# Allegro board MX6-CUST_V1_3-FINAL.brd
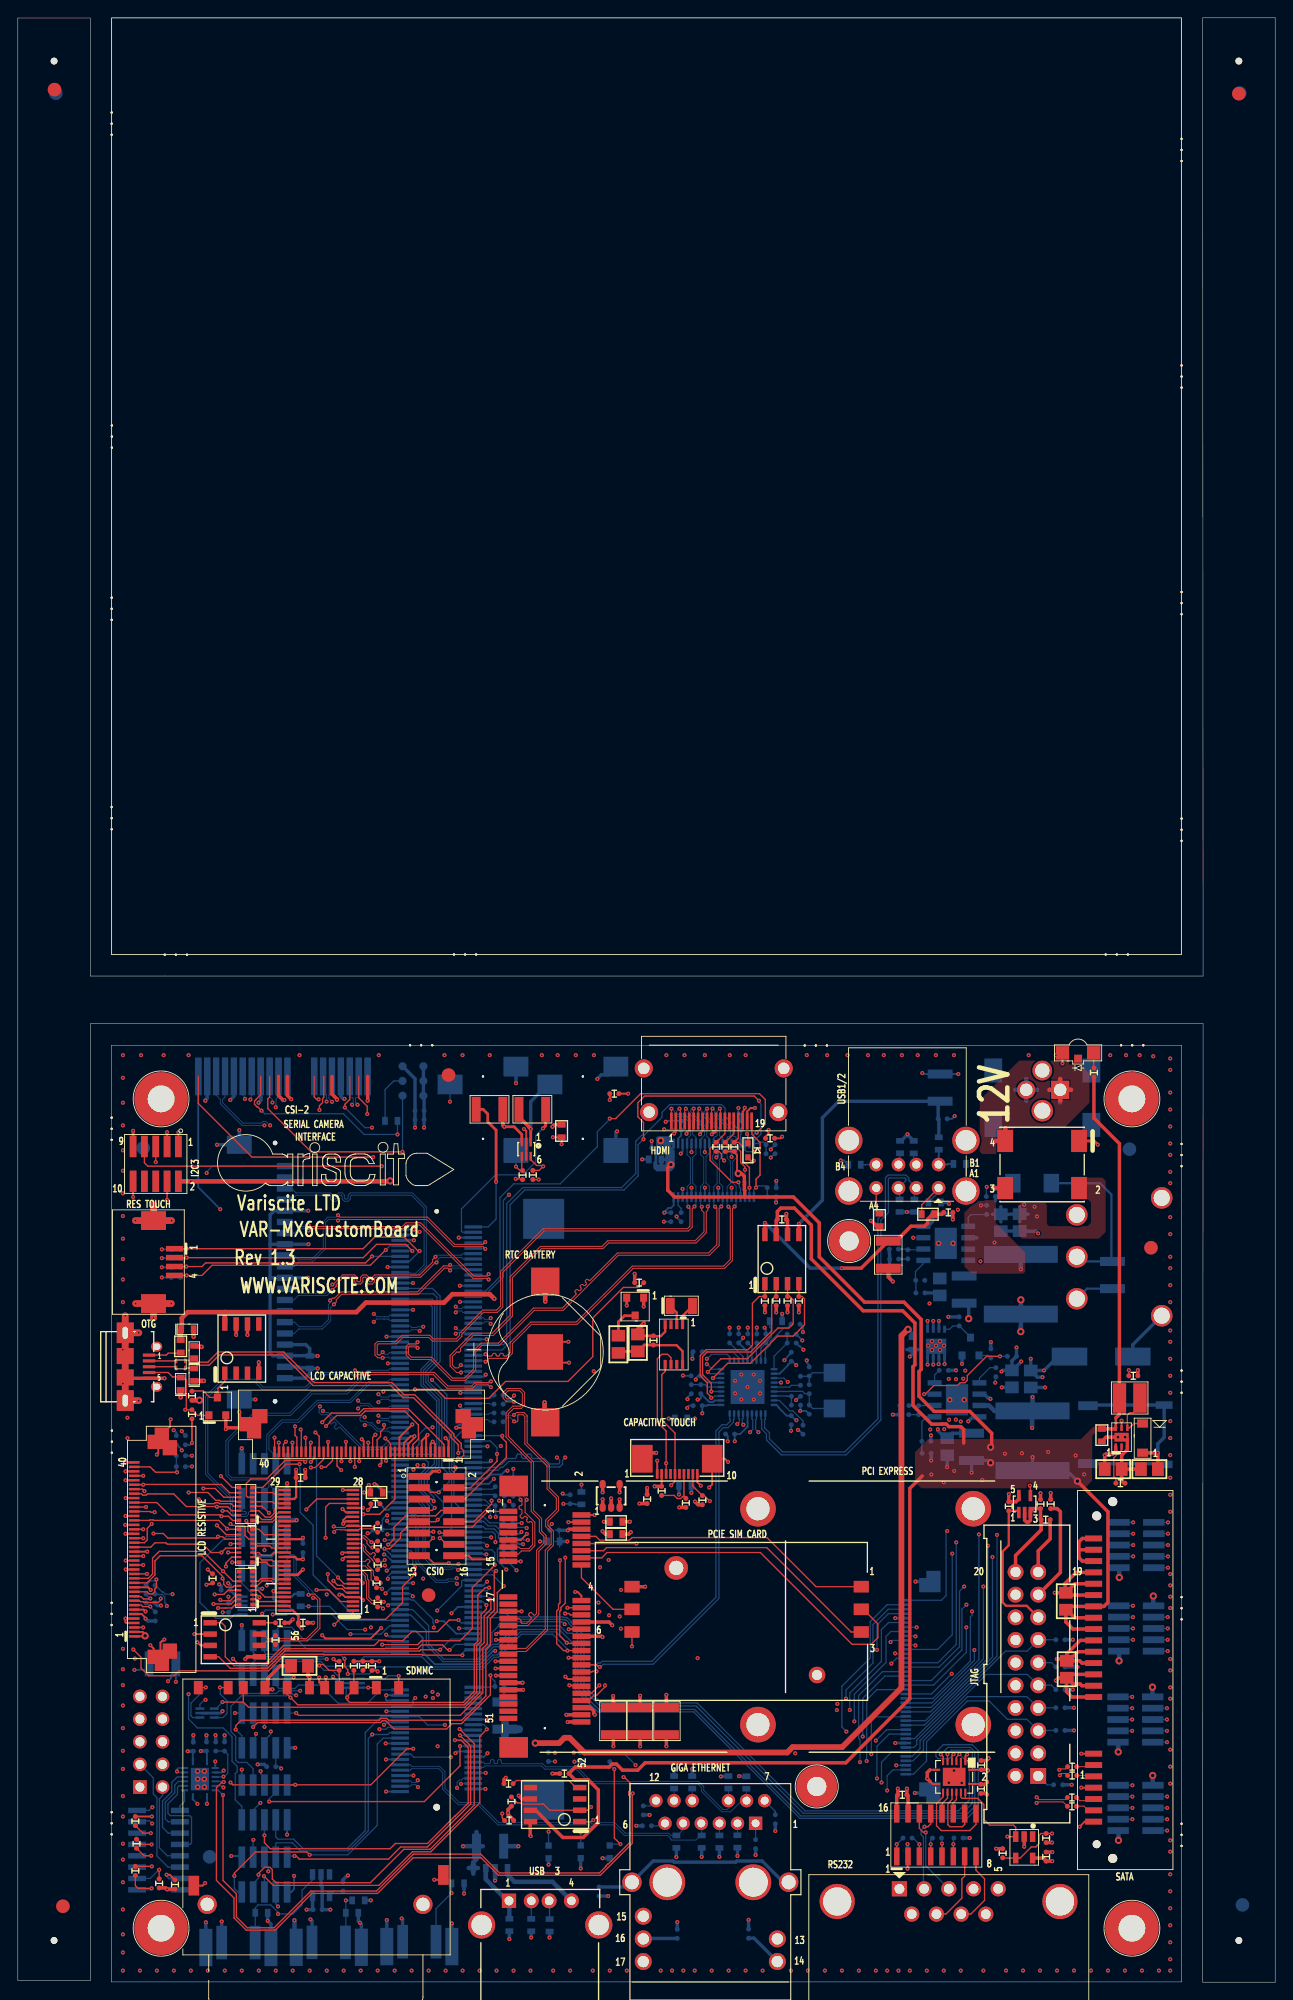
[diagram p0: board, top side]
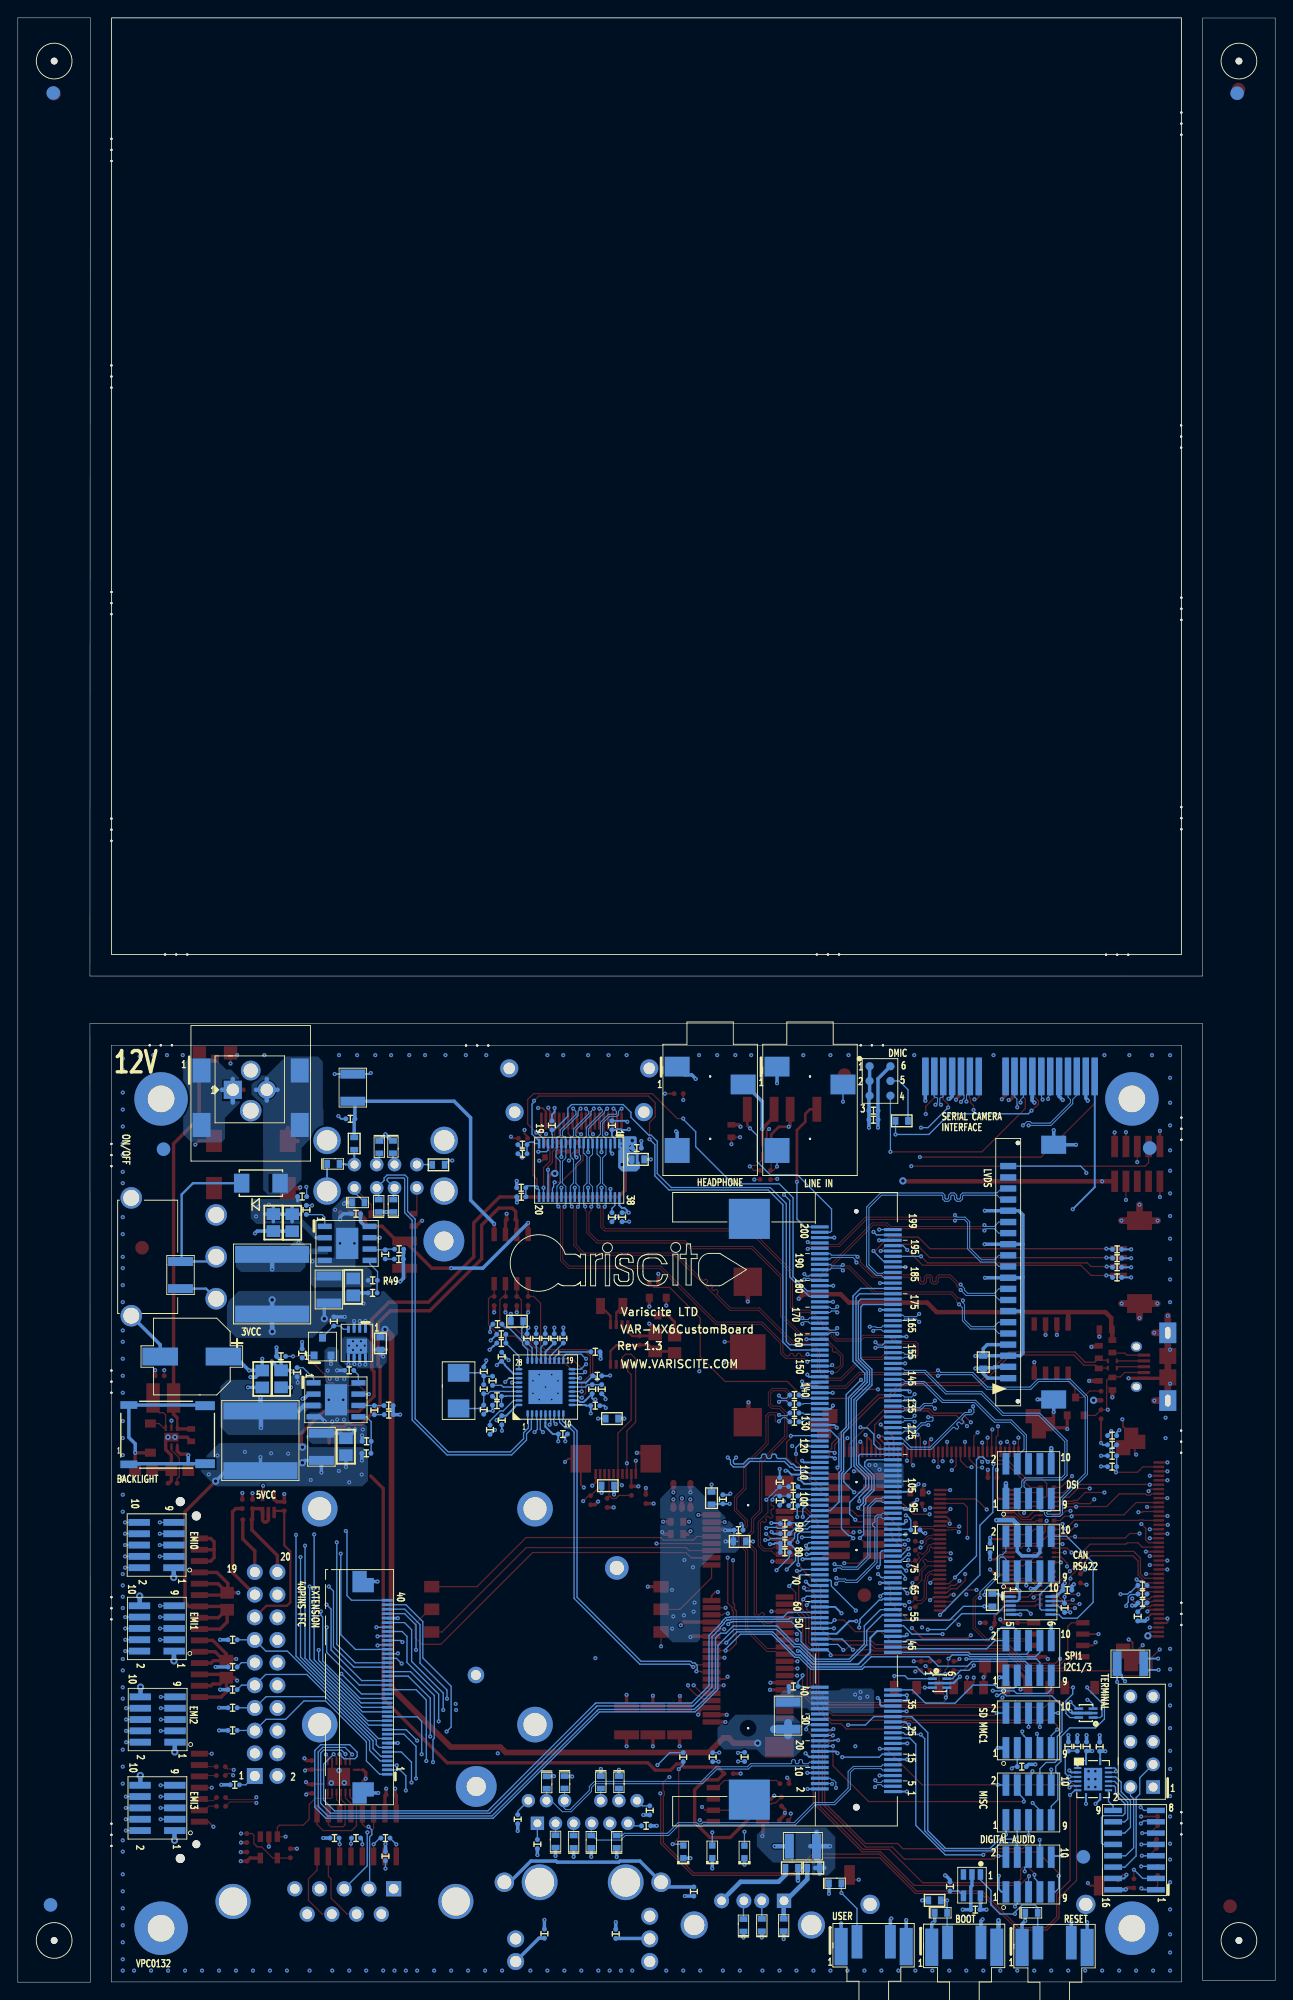
[diagram p1: board, bottom side, seen from below]

Outline 141.03 x 220.19 mm; copper layers: TOP, L2-GND, L3-SIG, L4-SIG, L5-VCC, BOTTOM. Coordinates in mm from the lower left corner of the outline.
Outline path: rectangle 10.52,115.19 130.52,220.19 ; 0,220.17 0,0.2 8.14,0.2 8.14,107.44 132.94,107.44 132.9,0 141.03,0 141.03,220.19 132.9,220.19 132.94,112.78 8.13,112.78 8.13,220.17 0,220.17 ; 10.52,105.03 10.52,0.03 130.52,0.03 130.52,105.03 10.52,105.03

## Design rules (mm)
net group C_HDMI: nets C_HDMI_SCL C_HDMI_SDA
net group CSI0: nets CSI_D0M CSI_D0P
net group CSI1: nets CSI_D1M CSI_D1P
net group CSI2: nets CSI_D2M CSI_D2P
net group CSI3: nets CSI_D3M CSI_D3P
net group CSIC: nets CSI_CLK0M CSI_CLK0P
net group DSI0: nets DSI_D0M DSI_D0P
net group DSIC: nets DSI_CLK0M DSI_CLK0P
net group GE0: nets GETH_TR0N GETH_TR0P
net group MMC1: nets SDMMC1_CMD SDMMC1_DAT0
net group MMC2: nets SDMMC2_CD_CAN2_TX SDMMC2_DAT1
net group CLK: nets CLKO2 CSI0_HSYNC CSI0_PIXCLK CSI0_VSYNC I2C1_SCL I2C2_SCL I2C3_SCL PCI3_UIM_CLK
net group DIFF_90: nets USB_HUB_DN1 USB_HUB_DN2 USB_HUB_DN3 USB_HUB_DN4 USB_HUB_DP1 USB_HUB_DP2 USB_HUB_DP3 USB_HUB_DP4 USB_OTG_DM USB_OTG_DP USBH_DN0 USBH_DP0
net group DIFF_100: nets CANH CANL CLK1_N CLK1_P DSI_D1M GETH_TR1P GETH_TR2N GETH_TR2P GETH_TR3N GETH_TR3P HDMI_CLKM HDMI_CLKP HDMI_D0M HDMI_D0P HDMI_D1M HDMI_D1P HDMI_D2M HDMI_D2P PCIE_RXM PCIE_RXP PCIE_TXM PCIE_TXP SATA_RXN SATA_RXP SATA_TXN SATA_TXP SATAC_RXN SATAC_RXP SATAC_TXN SATAC_TXP
net group DSI1: nets DSI_D1P
net group DSS_C: nets ACBIAS DB2 DB3 DB4 DB5 DB6 DB7 DG2 DG3 DG4 DG5 DG6 DG7 HSYNC N32034929 N32034943 VSYNC
net group GE1: nets GETH_TR1N
net group H_HDMI: nets HDMI_DDCCEC HDMI_HPD I2C2_SDA
net group I2C_PCIE: nets I2C3_SDA
net group JTAG: nets JTAG_TCK JTAG_TDI JTAG_TDO JTAG_TMS
net group LVDS1_MG: nets LVDS1_CLK_N LVDS1_CLK_P LVDS1_TX0_N LVDS1_TX0_P LVDS1_TX1_N LVDS1_TX1_P LVDS1_TX2_N LVDS1_TX2_P LVDS1_TX3_N LVDS1_TX3_P
net group PAIR_USB: nets VCC_USB1_C
net group PCIE_CN: nets PCIE_CREFCLKM PCIE_CREFCLKP PCIE_CRXM PCIE_CRXP PCIE_CTXM PCIE_CTXP
net group PCIE_UIM: nets PCIE_UIM_DATA PCIE_UIM_PWR PCIE_UIM_RST PCIE_UIM_VPP
net group POWER: nets PWR_IN3 PWR_IN4 VCC_USB2
net group POWER_PH: nets 3V3_SOM AUD_GND CAM_EN_CSPI_CS1 CSPI1_CS0 GETH_LED1 LED_BL_A LED_BL_K N18217097 OTG_VBUS RTC_BACKUP SOM_PER_3V3 VCC_1V5_PCIE VCC_5V_HD1 VCC_USB1 VCC_USB2_C
net group RS232DRIVER: nets UART3_RX
net group SDMMC1: nets SDMMC1_CLK SDMMC1_DAT1 SDMMC1_DAT2 SDMMC1_DAT3 SDMMC2_CLK
net group SDMMC2: nets SDMMC2_CMD SDMMC2_DAT0 SDMMC2_DAT2 SDMMC2_DAT3
net group SPINOR: nets CSPI1_SCLK CSPI1_SIMO CSPI1_SOMI

## Placement (name value [footprint] x y rotation side)
C3  100nF  [C0402]  66.9 99.59 180 top
C4  47uF  [1210]  52.91 97.84 0 top
C5  47uF  [1210]  57.71 97.84 180 top
C6  100nF  [C0402]  57.76 90.48 270 top
C7  100nF  [C0402]  56.61 90.47 270 top
C8  1uF  [C0402]  104.37 86.28 0 top
C9  47uF  [C1210]  97.64 81.53 270 top
C10  220nF  [C0402]  123.67 55.93 0 top
C11  2.2uF,50V  [C0805]  126.92 57.51 180 top
C12  4.7uF  [C0603]  121.59 61.32 270 top
C13  100nF  [C0402]  31.72 56.54 0 top
C14  10uF  [C0603]  40.23 54.89 0 top
C15  1uF  [C0402]  70.59 54.15 90 top
C16  100nF  [C0402]  74.93 53.72 270 top
C17  100nF  [C0402]  40.11 53.62 0 top
C18  100nF  [C0402]  114.71 53.59 270 top
C19  2.2uF  [C0603]  67.11 51.61 0 top
C20  2.2uF  [C0603]  67.11 50.22 180 top
C21  100nF  [C0402]  31.98 48.67 270 bottom
C22  100nF  [0402]  21.84 45.26 90 top
C23  22uF  [C0805]  117.55 42.7 270 top
C24  100nF  [C0402]  31.98 40.28 0 top
C25  100nF  [C0402]  38.71 35.46 270 top
C26  100nF  [C0402]  39.73 35.46 270 top
C27  22uF  [C0805]  117.65 35.08 270 top
C28  100uF  [C1210]  66.8 29.26 90 top
C29  100uF  [C1210]  69.8 29.26 90 top
C30  100uF  [C1210]  72.75 29.26 90 top
C31  10nF  [C0402]  118.26 24.16 0 top
C32  100nF  [C0402]  61.3 23.38 0 top
C33  10nF  [C0402]  118.26 23.16 0 top
C34  10nF  [C0402]  118.24 20.7 0 top
C35  1uF  [C0402]  99.21 21.01 180 top
C36  10nF  [C0402]  118.24 19.71 0 top
C37  1uF  [C0402]  13.18 18.06 270 top
C38  1uF  [C0402]  13.31 15.52 90 top
C39  1uF  [C0402]  13.18 12.47 90 top
C40  1uF  [C0402]  15.85 11.07 270 top
C41  1uF  [C0402]  17.63 10.95 90 top
C42  100nF  [C0402]  45.06 97.69 0 bottom
C43  1uF  [C0402]  45.06 96.67 0 bottom
C44  47uF  [C1210]  103.45 100.28 90 bottom
C46  1uF  [C0402]  103.73 96.77 0 bottom
C47  100nF  [C0402]  74.4 96.04 90 bottom
C48  100nF  [C0402]  71.6 93.5 180 bottom
C49  100nF  [C0402]  84.43 92.86 0 bottom
C50  4.7uF  [C0603]  71.48 92.23 180 bottom
C53  100nF  [C0402]  84.56 88.04 0 bottom
C54  100nF  [C0402]  108.66 86.56 270 bottom
C55  100nF  [C0402]  103.1 86.13 0 bottom
C56  100nF  [C0402]  74.4 85.75 270 bottom
C57  100nF  [C0402]  73.25 85.75 270 bottom
C58  10uF  [C0805]  112.37 85.14 270 bottom
C59  10uF  [C0805]  110.26 85.13 270 bottom
C60  470pF  [C0402]  17.73 82.14 180 bottom
C61  6.8nF  [C0402]  98.27 82.16 0 bottom
C62  470pF  [C0402]  17.73 81.15 180 bottom
C63  100nF  [C0402]  85.7 85.5 180 top
C64  330uF  [EEE1EA331UP]  121.51 70.13 0 bottom
C65  6.8nF  [C0402]  98.29 81.05 0 bottom
C66  470pF  [C0402]  17.73 80.14 180 bottom
C67  470pF  [C0402]  17.73 78.99 180 bottom
C68  10uF  [C0805]  103.41 77.93 90 bottom
C69  47uF  [C1210]  106.15 77.65 90 bottom
C70  2.2uF  [C0603]  85.04 74.09 0 bottom
C71  100nF  [C0402]  80.86 72.16 90 bottom
C72  100nF  [C0402]  86.76 70.1 90 bottom
C73  100nF  [C0402]  103.86 68.58 0 bottom
C74  22pF  [C0402]  88.76 68.45 90 bottom
C75  100nF  [C0402]  109.7 68.38 90 bottom
C76  100nF  [C0402]  76.03 67.97 180 bottom
C77  10uF  [C0805]  111.5 67.62 270 bottom
C78  10uF  [C0805]  113.61 67.61 270 bottom
C79  1uF  [C0402]  76.61 66.47 270 bottom
C80  100nF  [C0402]  75.54 66.47 270 bottom
C81  100nF  [C0402]  53.92 65.81 0 bottom
C82  100nF  [C0402]  87.28 65.67 0 bottom
C83  4.7uF  [C0603]  32.74 69.49 90 bottom
C85  100nF  [C0402]  53.92 64.8 0 bottom
C86  1uF  [C0402]  87.28 64.68 0 bottom
C87  6.8nF  [C0402]  99.45 64.63 0 bottom
C88  100nF  [C0402]  76.26 64.62 180 bottom
C90  22pF  [C0402]  88.77 64.18 270 bottom
C91  100nF  [C0402]  53.92 63.8 0 bottom
C92  6.8nF  [C0402]  99.42 63.62 0 bottom
C93  100nF  [C0402]  86.75 62.99 270 bottom
C94  100nF  [C0402]  53.92 62.81 0 bottom
C96  100nF  [C0402]  79.89 61.44 180 bottom
C98  47uF  [C1210]  106.98 60.02 90 bottom
C99  10uF  [C0805]  104.23 60.02 90 bottom
C100  4.7uF  [C0603]  74.85 55.65 180 bottom
C101  100nF  [C0402]  54.05 55.55 0 bottom
C102  100nF  [C0402]  54.05 54.51 0 bottom
C103  4.7uF  [C0603]  63.22 54.25 90 bottom
C104  100nF  [C0402]  61.95 54.13 90 bottom
C105  100nF  [C0402]  60.2 50.67 180 bottom
C106  4.7uF  [C0603]  60.07 49.4 180 bottom
C107  100nF  [C0402]  71.3 71.93 90 top
C108  22UF  [C0805]  69.55 71.65 90 top
C109  100nF  [C0402]  23.32 43.94 180 bottom
C110  47uF  [1210]  16.23 35.69 180 bottom
C111  22UF  [C0805]  31.6 35.46 180 top
C112  100nF  [C0402]  70.15 19.25 90 bottom
C113  100nF  [C0402]  84.96 18.26 90 bottom
C115  100nF  [C0402]  70.56 17.53 0 bottom
C116  1uF  [C0402]  99.8 14.12 270 bottom
C117  1uF  [C0402]  103.1 16.15 180 bottom
C118  1uF  [C0402]  105.51 16.15 0 bottom
C119  1uF  [C0402]  99.8 16.15 180 bottom
C120  100nF  [C0402]  82.75 15.47 90 bottom
C121  47uF  [C1210]  52.98 15.24 0 bottom
C122  22pF  [C0402]  36.47 10.72 90 bottom
C123  100nF  [C0402]  33.63 8.13 0 bottom
C124  100nF  [C0402]  19.68 26.39 90 bottom
C126  100nF  [C0402]  108.05 24.33 90 top
C127  100nF  [C0402]  21.16 26.42 90 bottom
C128  100nF  [C0402]  115.34 14.07 90 top
C129  100nF  [C0402]  110.46 14.45 90 top
C130  100nF  [C0402]  108.03 21.67 270 top
CX1  4.7uF  [C0603]  38.2 9.17 0 bottom
D1  LED GREEN  RA  [HSMG-C680]  118.92 104.17 180 top
D2  30V,100mA  [SSMINI2]  81.89 93.24 90 top
D3  0.5A 20V  [SOD123]  126.16 60.99 90 top
D4  PGB1010603MR  [D0603]  98.96 93.61 270 bottom
D5  PGB1010603MR  [D0603]  100.48 93.6 270 bottom
D6  PGB1010603MR  [D0603]  105.64 91.72 180 bottom
D7  RSX501L-20  [D_RCX501L]  113.77 89.56 0 bottom
D8  PGB1010603MR  [D0603]  102.84 87.4 180 bottom
D9  PGB1010603MR  [D0603]  100.56 87.03 90 bottom
D10  PGB1010603MR  [D0603]  98.91 87.03 90 bottom
D11  PGB1010603MR  [D0603]  19.02 73.18 0 top
D12  PGB1010603MR  [D0603]  19.79 68.1 90 top
D13  PGB1010603MR  [D0603]  19.79 70.64 90 top
D14  PGB1010603MR  [D0603]  18.26 67.08 90 top
D15  BAT54C  [SOT23]  69.25 75.72 180 top
D16  PGB1010603MR  [D0603]  79.71 22.4 270 bottom
D17  PGB1010603MR  [D0603]  75.64 22.4 270 bottom
D18  PGB1010603MR  [D0603]  73.61 22.4 270 bottom
D19  PGB1010603MR  [D0603]  81.71 22.38 270 bottom
D20  PGB1010603MR  [D0603]  80.72 15.77 90 bottom
D21  PGB1010603MR  [D0603]  78.69 15.75 90 bottom
D22  PGB1010603MR  [D0603]  76.71 15.75 90 bottom
D23  PGB1010603MR  [D0603]  73.86 15.75 90 bottom
D24  LED GREEN  [LED_SMT_0603_RA]  63.14 14.61 90 bottom
D25  LED GREEN  [LED_SMT_0603_RA]  66.39 14.61 90 bottom
D26  LED GREEN  [LED_SMT_0603_RA]  59.53 14.6 90 bottom
D27  PGB1010603MR  [D0603]  49.35 11.07 180 bottom
D28  PGB1010603MR  [D0603]  37.49 7.77 180 bottom
D29  PGB1010603MR  [D0603]  27.33 7.77 180 bottom
D30  PGB1010603MR  [D0603]  55.13 6.41 90 bottom
D31  PGB1010603MR  [D0603]  57.58 6.4 90 bottom
D32  PGB1010603MR  [D0603]  59.64 6.38 90 bottom
FB2  600R_100Mhz 200mA  [FB0603]  74.4 63.17 180 bottom
FB4  100 Ohm  [RC0805]  67.36 71.5 90 top
FB7  600R_100Mhz 200mA  [FB0603]  18.26 71.27 90 top
FD1  -  [FIDUCIAL]  48.31 101.68 0 top
FD2  -  [FIDUCIAL]  127.1 82.32 0 top
FD3  -  [FIDUCIAL]  46.08 43.38 0 top
FD4  -  [FIDUCIAL]  14.07 93.5 180 bottom
FD5  -  [FIDUCIAL]  124.69 93.37 180 bottom
FD6  -  [FIDUCIAL]  21.51 14.05 180 bottom
FD7  -  [FIDUCIAL]  137.36 8.66 180 bottom
FD8  -  [FIDUCIAL]  4.27 211.73 180 bottom
FD*  -  [unnamed#3]  136.96 211.68 0 top
FD*#2  -  [unnamed#3]  4.11 212.14 0 top
HOLE1  NC  [HOLE3_6]  16.07 99 0 top
HOLE2  NC  [HOLE3_6]  124.96 99 0 top
HOLE3  NC  [HOLE_85_180]  93.24 83.07 0 top
HOLE4  NC  [HOLE_85_180]  89.61 21.94 0 top
HOLE5  NC  [HOLE3_6]  16.07 6.05 0 top
HOLE6  NC  [HOLE3_6]  124.96 6.05 0 top
J1  HDMI CONN  [HDMI-SMT-W-FLANGE]  78.06 99.98 180 top
J2  HEADER 5X2 1.27mm  [20021121-00010C4LF]  15.47 91.72 180 top
J3  72309-8034BLF  [DUAL_USB_72309]  103.28 89.03 180 top
J4  MOLEX_52207-0485  [CONR_6_MOLEX_39_SMD]  16.17 80.72 270 top
J6  40p FFC connector  [CONR_42_MOLEX_197_SMD_S]  38.55 59.44 180 top
J7  10 POS FFC/FPC  [1-1734592-0]  73.96 58.57 180 top
J8  HEADER 8X2 1.27mm SMT  [20021121-00016C4LF]  46.96 52.25 270 top
J9  40p FFC connector  [CONR_42_MOLEX_197_SMD_S]  13.05 48.51 90 top
J10  -  [0483380085]  59.12 40.97 90 top
J11  CON 6 SIM CARD  [CON_SIM_CD_2P54MM]  80.04 40.43 0 top
J12  SATA 15 +7  [SATA_F]  120.67 33.86 180 top
J13  MMC-SD Connector  [10067847]  33.34 20.87 0 top
J14  RJ45 1GB W G/Y  [L829-1J1T-43]  82.75 17.81 180 top
J15  RS232  [CONR_11_RD_SERIES]  98.88 10.46 0 top
J16  USB TYPE A  [USB_TYPEA_TH_RA]  55.09 9.12 0 top
J17  PCIE-036-02-F-D-EMS2  [PCIE_36_EMS2]  19.59 105.03 0 bottom
J18  PC 1727010  [1727010]  116.92 100.03 180 bottom
J19  163-0180-EX  [CONR_3_DC3_S]  114.91 99.14 270 bottom
J20  SPDIF  JACK  [SJ-3523-SMT]  63.38 98.03 90 bottom
J21  SPDIF  JACK  [SJ-3523-SMT]  52.18 98.03 90 bottom
J22  DF14-20P-1.25H  [DF14H-20P-1_25H]  29.95 79.59 0 bottom
J23  SM02B-BHSS-1-TB(LF)(SN)  [BHSR-02VS-1]  124.23 61.37 180 bottom
J24  HEADER 5X2 1.27mm  [20021121-00010C4LF]  27.66 56.16 180 bottom
J25  -  [DIMM200]  46.98 53.01 270 bottom
J26  HEADER 5X2 1.27mm  [20021121-00010C4LF]  27.66 48.03 180 bottom
J27  HEADER 5X2 1.27mm  [20021121-00010C4LF]  125.47 49 90 bottom
J28  HEADER 5X2 1.27mm  [20021121-00010C4LF]  27.66 36.35 180 bottom
J29  HEADER 5X2 1.27mm  [20021121-00010C4LF]  125.44 39.65 90 bottom
J30  40p FFC connector  [62684-401100ALF_REV]  101.25 33.06 270 bottom
J31  HEADER 5X2 1.27mm  [20021121-00010C4LF]  125.35 29.44 90 bottom
J32  HEADER 5X2 1.27mm  [20021121-00010C4LF]  27.66 28.22 180 bottom
J33  HEADER 10x2  [HDR_20M_100_TH]  114.45 23.11 180 top
J34  RA HEADER 5X2  [JUMP2X5-6040]  13.69 21.87 90 bottom
J35  HEADER 5X2 1.27mm  [20021121-00010C4LF]  27.66 20.14 180 bottom
J36  HEADER 5X2 1.27mm  [20021121-00010C4LF]  125.37 19.53 90 bottom
J37  HEADER 5X2 1.27mm  [20021121-00010C4LF]  27.66 12.06 180 bottom
J38  -  [47589-0001]  12.57 68.99 270 top
JBT1  CR1225-HOLDER  [KEYSTONE-3000]  59.16 70.64 90 top
L2  CPFC85NP-WH07  [L_CPFC85]  114.89 91.65 180 top
L3  0R  [R0603]  102.08 86.08 180 top
L4  0R  [R0603]  96.65 85.45 90 top
L5  10uH  [LQH3NPN100NJ0L]  124.71 65.48 180 top
L6  0R  [R0603]  103.3 94.01 90 bottom
L7  0R  [R0603]  93.85 91.62 180 bottom
L8  10uH  [NR]  112.51 78.23 270 bottom
L9  15uH  [NR]  113.82 60.68 270 bottom
L10  0R  [R0603]  54.23 12.8 180 bottom
L11  0R  [R0603]  51.79 12.8 180 bottom
L14  -  [DLP11TB800UL2]  18.26 69.24 180 top
NOREF  -  [unnamed]  10.16 40.03 90 top
NOREF#2  -  [#2]  0 0.2 90 top
NOREF#3  -  [#2]  10.52 0.03 0 top
NOREF#4  -  [unnamed]  10.16 152.7 90 top
NOREF#5  -  [unnamed]  43.99 105.38 0 top
NOREF#6  -  [unnamed]  130.9 130.43 270 top
NOREF#7  -  [unnamed]  130.9 181.23 270 top
NOREF#8  -  [unnamed]  88.26 105.36 0 top
NOREF#9  -  [unnamed]  10.16 16.56 90 top
NOREF#10  -  [unnamed#3]  5.05 8.51 0 top
NOREF#11  -  [unnamed]  10.19 172.01 90 top
NOREF#12  -  [unnamed]  130.9 17.76 270 top
NOREF#13  -  [unnamed]  10.19 59.34 90 top
NOREF#14  -  [#2]  -171.11 -108.25 0 top
NOREF#15  -  [unnamed]  18.97 114.8 180 top
NOREF#16  -  [unnamed]  124.51 114.83 180 top
NOREF#17  -  [unnamed]  130.9 93.96 270 top
NOREF#18  -  [#2]  10.52 220.19 0 top
NOREF#19  -  [#2]  0 220.17 0 top
NOREF#20  -  [unnamed]  123.75 105.38 0 top
NOREF#21  -  [unnamed]  130.9 155.83 270 top
NOREF#22  -  [unnamed]  10.16 129.23 90 top
NOREF#23  -  [#2]  132.9 0 0 top
NOREF#24  -  [unnamed]  130.9 68.56 270 top
NOREF#25  -  [unnamed]  10.16 207.08 90 top
NOREF#26  -  [unnamed]  51.41 114.83 180 top
NOREF#27  -  [unnamed]  10.16 94.42 90 top
NOREF#28  -  [unnamed]  130.9 206.63 270 top
NOREF#29  -  [unnamed]  130.9 43.16 270 top
NOREF#30  -  [unnamed#4]  136.96 4.67 180 bottom
NOREF#31  -  [unnamed#4]  4.06 4.67 180 bottom
NOREF#32  -  [unnamed#3]  137.06 211.76 180 bottom
NOREF#33  -  [unnamed#4]  136.96 215.34 180 bottom
NOREF#34  -  [unnamed#4]  4.06 215.34 180 bottom
Q1  NTR3161N  [SOT-23]  22.38 64.54 0 top
Q2  BSZ086P03NS3 G  [PG-TSDSON-8]  103 71.68 0 bottom
Q3  NDS335N  [SOT23]  106.86 71.25 180 bottom
R1  510  [R0402]  120.7 101.96 90 top
R2  0R  [R0603]  60.99 95.41 270 top
R3  100R  [R0402]  84.38 94.59 0 top
R4  27K  [R0402]  78.33 93.62 90 top
R5  4.7K  [R0402]  79.35 93.62 90 top
R6  4.7K  [R0402]  80.37 93.62 90 top
R7  1.24R  [R0805]  122.86 57.51 0 top
R8  10K  [R0402]  125.12 67.97 0 top
R9  1K  [R0402]  19.53 65.74 90 top
R10  1K  [R0402]  19.53 63.65 90 top
R13  10K  [R0402]  115.29 51.84 180 top
R14  1K  [R0402]  72.21 55.07 270 top
R15  10K  [R0402]  115.85 53.59 270 top
R16  1K  [R0402]  76.78 54.03 90 top
R17  27R  [RNEXB2HV]  25.56 53.59 90 top
R18  100R  [R0402]  40.36 50.95 90 top
R19  10K  [R0402]  111.15 53.34 270 top
R20  100R  [R0402]  40.36 48.92 90 top
R21  27R  [RNEXB2HV]  25.56 48.9 90 top
R22  100R  [R0402]  40.36 46.76 90 top
R23  100R  [R0402]  40.23 44.73 90 top
R24  27R  [RNEXB2HV]  25.57 44.17 90 top
R25  100R  [R0402]  40.36 42.57 90 top
R26  4.7K  [R0402]  29.41 40.28 0 top
R27  120 R 1%  [R0402]  28.91 38.35 90 top
R28  10K  [R0402]  116.94 38.38 180 bottom
R29  10K  [R0402]  116.94 35.33 0 bottom
R30  10K  [R0402]  36.04 35.46 270 top
R31  10K  [R0402]  37.69 35.46 270 top
R32  10K  [R0402]  116.94 32.79 0 bottom
R33  10K  [R0402]  116.94 30.76 180 bottom
R34  10K  [R0402]  116.94 28.22 180 bottom
R35  100R  [R0402]  116.69 22.12 180 bottom
R36  1K  [R0402]  55.04 22.25 180 top
R37  1K  [R0402]  55.37 20.24 90 top
R38  1K  [R0402]  55.1 18.13 180 top
R40  47K  [R0402]  81.13 96.04 270 bottom
R41  10K  [R0402]  22.2 26.42 270 bottom
R42  1K  [R0603]  41.88 96.55 0 bottom
R43  47K  [R0402]  84.43 93.88 180 bottom
R44  10K  [R0402]  23.19 26.42 90 bottom
R45  15K 1%  [R0402]  84.57 89.05 0 bottom
R46  0R  [R1210]  122.78 79.27 90 bottom
R47  100K  [R0402]  109.14 88.06 180 bottom
R48  6.34K  [R0402]  99.82 81.58 270 bottom
R49  8.45K 1%  [R0402]  101.22 78.67 0 bottom
R50  22K  [R0402]  101.24 77.26 0 bottom
R51  10K  [R0402]  105.59 74.07 270 bottom
R52  100K  [R0402]  87.23 73.76 180 bottom
R53  100K  [R0402]  86.8 72.62 180 bottom
R54  470K  [R0402]  83.91 72.16 270 bottom
R55  100K  [R0402]  82.89 72.16 90 bottom
R56  100K  [R0402]  81.87 72.16 90 bottom
R57  100K  [R0402]  79.84 72.16 90 bottom
R58  1K  [R0402]  85.06 76.35 90 top
R59  1K  [R0402]  83.79 76.35 90 top
R60  1K  [R0402]  87.6 76.35 90 top
R61  1K  [R0402]  86.33 76.35 90 top
R62  100K  [R0402]  86.8 71.64 0 bottom
R63  0R  [R0603]  100.36 71.6 270 bottom
R64  1K  [R0402]  76.25 70.66 180 bottom
R65  10K  [R0402]  109.14 70.48 270 bottom
R66  100K  [R0402]  111.51 70.15 180 bottom
R67  22R  [R0402]  87.78 67.41 270 bottom
R68  1M  [R0402]  88.77 66.47 90 bottom
R69  6.34K  [R0402]  101.05 64.12 270 bottom
R70  12.1K 1%  [R0402]  88.07 61.92 270 bottom
R71  1K  [R0402]  18.29 61.27 180 bottom
R72  10K  [R0402]  101.91 60.63 0 bottom
R73  1K  [R0402]  18.29 60.23 0 bottom
R74  45.3K  [R0402]  101.93 59.28 0 bottom
R75  1K  [R0402]  18.29 59 0 bottom
R76  1K  [R0402]  18.29 57.79 180 bottom
R77  49.9R 1%  [R0402]  55.58 56.03 90 bottom
R79  49.9R 1%  [R0402]  55.58 53.97 270 bottom
R80  1K  [R0402]  69.7 78.41 0 top
R81  0R  [R0402]  54.05 53.42 180 bottom
R82  4.7K  [R0402]  54.99 51.41 180 bottom
R83  4.7K  [R0402]  40.36 50.7 0 bottom
R84  4.7K  [R0402]  54.99 50.27 180 bottom
R85  4.7K  [R0402]  54.99 49.2 180 bottom
R86  10K  [R0402]  54.99 48.18 180 bottom
R87  1K  [R0603]  31.72 42.82 90 bottom
R88  100R  [R0402]  23.62 41.96 270 bottom
R89  0R  [R0402]  14.88 44.48 0 bottom
R90  0R  [R0402]  14.88 43.51 0 bottom
R91  1K  [R0402]  14.88 42.52 180 bottom
R92  1K  [R0402]  15.42 41 270 bottom
R93  10K  [R0402]  54.03 33.15 180 bottom
R94  0R  [R1210]  54.64 29.87 270 bottom
R97  330R  [R0402]  59.51 25.25 90 bottom
R98  330R  [R0402]  66.4 25.22 90 bottom
R99  330R  [R0402]  63.09 25.22 90 bottom
R100  10K  [R0402]  28.42 24.16 180 bottom
R101  0R  [R0402]  65.2 10.16 270 bottom
R102  49.9R 1%  [R0402]  81.97 5.44 90 bottom
R103  49.9R 1%  [R0402]  73.96 5.41 90 bottom
R151  10K  [R0402]  115.34 16.15 270 top
SW1  -  [500SSP1S1M6QEA]  118.78 76.61 0 bottom
SW2  -  [KT11B2SAM34LFS]  45.03 3.99 90 bottom
SW3  -  [KT11B2SAM34LFS]  34.87 3.91 90 bottom
SW4  -  [KT11B2SAM34LFS]  24.74 3.89 90 bottom
U1  ESD  [SOT-666IP]  57.03 93.38 180 top
U2  DC-DC LED Driver tps61165  [QFN-6]  123.8 61.09 0 top
U3  MIC2076-1YM  [SOIC8]  25.12 71.02 90 top
U4  ADP130AUJZ-1.5-R7  [SOT23-5]  66.55 54.51 0 top
U5  NC7SP125P5X  [SC70-5_A]  112.93 53.59 90 top
U6  SN75LVDS82  [TSSOP56]  33.76 48.41 180 top
U7  SN65HVD234DR  [SOIC8]  24.33 38.38 0 top
U8  MIC2076-1YM  [SOIC8]  60.26 19.9 180 top
U9  MAX3232D  [SOIC16_150]  103.03 16.5 0 top
U10  Digital MIC  [SPM0423HE4H-WB]  44.32 101.02 180 bottom
U12  CM2020  [TSSOP_38_TPD12S521]  78.06 91.01 270 bottom
U13  RT8250  [SOP-8-RT8293A]  104.09 82.81 270 bottom
U14  MIC2076-1YM  [SOIC8]  85.7 81.05 90 top
U15  USB2514Bi-AEZG  [QFP_6X6_36]  81.85 66.71 90 bottom
U16  RT8250  [SOP-8-RT8293A]  105.34 65.28 270 bottom
U18  ISL12057  [MSOP8]  73.58 71.48 180 top
U19  LTC2858-2  [MSOP10]  27.43 42.21 270 bottom
U20  ESD  [SOT-666IP]  37.63 33.52 270 bottom
U21  ESD  [SOT-666IP]  21.23 30.16 90 bottom
U23  MAX3232D  [SOIC16_150]  15.78 14.8 90 bottom
U24  ISL88011IH531Z-TK  [SOT23-5_ISL88011]  34.01 10.87 0 bottom
U25  SN74AVC4T245  [PVQFN_16N]  105.03 23.01 180 top
U26  SN74AVC4T245  [PVQFN_16N]  20.42 22.76 270 bottom
U27  MCP1322  [SOT23-5_ISL88011]  112.88 15.11 180 top
Y1  24 Mhz  [NX5032GB]  91.59 66.31 90 bottom
Y2  FC-135  [Y_FC135]  74.42 75.79 0 top

## Library data of the parts
C3 C47 C48 C53 C56 C57 = CAP_100nF_0402: room: HDMI
C4 C5 C9 C44 C121 = CAP_47uF_1210
C6 C7 = CAP_100nF_0402: room: SW
C8 C15 C46 = CAP_1uF_0402: room: USB RAIR
C10 = CAP_220nF_0402: room: POWER BL
C11 C19 C20 = CAP_2.2uF_0603
C12 = CAP_4.7uF_0603: room: POWER BL
C13 C17 C21 C24 = CAP_100nF_0402: room: CHANNEL3
C14 = CAP_10uF_0603
C16 C18 C22 C42 C49 C107 C109 C112 C113 C115 C120 C123 C128 C129 = CAP_100nF_0402
C23 C27 = CAP_22uF_0805
C25 C26 C124 C126 C127 C130 = CAP_100nF_0402: room: UART
C28-C30 = CAP_NP
C31 C33 C34 C36 = CAP_10nF_0402
C32 = CAP_100nF_0402: room: USB FRONT
C35 C116-C119 = CAP_1uF_0402: room: UART
C37-C41 C43 = CAP_1uF_0402
C50 C83 = CAP_4.7uF_0603: room: HDMI
C54 C55 = CAP_100nF_0402: room: 3V3
C58 C59 C68 C77 C78 C99 C108 C111 = CAP_10uF_0805
C60 C62 C66 C67 = CAP_470pF_0402: room: TOUCH
C61 C65 = CAP_6.8nF_0402: room: 3V3
C63 = CAP_100nF_0402: room: USB RAIR
C64 = CAP_ELECT_330uF_25V
C69 = CAP_47uF_1210: room: 3V3
C70 = CAP_2.2uF_0603: room: USB HUB
C71 C72 C76 C80 C82 C88 C93 C96 = CAP_100nF_0402: room: USB HUB
C73 C75 = CAP_100nF_0402: room: 5V
C74 C90 = CAP_22pF_0402: room: USB HUB
C79 C86 = CAP_1uF_0402: room: USB HUB
C81 C85 C91 C94 C101-C106 = CAP_NP: room: MINIPCIE
C87 C92 = CAP_6.8nF_0402: room: 5V
C98 = CAP_47uF_1210: room: 5V
C100 = CAP_4.7uF_0603: room: USB HUB
C110 = CAP_47uF_1210: room: LCD
C122 = CAP_22pF_0402
CX1 = CAP_4.7uF_0603
D1 = LED GREEN 1208 RA
D2 = SCHOTTKY 30V 100mA SSMINI
D3 = SCHOTTKY 05A 20V SOD123
D4-D6 D8-D14 D16-D23 D27-D32 = ESD BI-DIR TRIG: room: USB HUB
D7 = SCHOTTKY 25V 5A SOD-106
D15 = SCHOTTKY 30V 200MA SOT23
D24-D26 = LED GREEN 0603 RA
FB2 = FERRIT 600R_100Mhz  200mA 0603: room: USB HUB
FB4 = FERRITEBEAD
FB7 = FERRIT 600R_100Mhz  200mA 0603: room: DBG_ETH
FD1-FD8 = FIDUCIAL
HOLE1 HOLE2 HOLE5 HOLE6 = HOLE_3x6mm
HOLE3 HOLE4 = HOLE_85_180
J1 = TMP_2
J2 J24 J26-J29 J31 J32 J35-J37 = HEADER 5X2 1.27mm SMT
J3 = CONN USB Type A_3: room: USB RAIR
J4 = CONN FFC/FPC 4POS 1MM R/A SMD: room: TOUCH
J6 = TMP_6: room: LCD
J7 = CONN FFC 10POS 0.5MM R/A BTM
J8 = HEADER 8X2 1.27mm SMT
J9 = TMP_9: room: LCD
J10 = MINI_PCI_0483380085_4.75MM
J11 = SF7W006S1A_1
J12 = CONN SATA1_0.8_F: room: SATA
J13 = CONN SD_CARD_FCI_10067847: room: SD
J14 = CONN RJ45 1000BT L829-1J1T-43
J15 = CONNECTOR DB9_0: room: UART
J16 = USB_CON_A
J17 = CONN_PCIE_EDGE_SENSOR_BOARD_3
J18 = TMP_233002
J19 = PHONEJACK_3: room: CHANNEL2
J20 J21 = AUDIO JACK
J22 = CON_LVDS_DF19G-20P-1H
J23 = CON 2 PIN Crimp Style
J25 = CONN_SODIMM_200_3.8V_iMX6
J30 = CON40_0
J33 = HEADER 10X2 TH
J34 = HEADER 5X2
J38 = CONN_USB_MICRO_1
JBT1 = BAT HOLDER CR1225
L2 = CHOKE COMMON MODE 4.0A SMD
L3 L4 L6 L7 L10 L11 R63 = RES_0R_0603
L5 = INDUCTOR: room: POWER BL
L8 = IND PWR SH 10uH 3.1A  8x8: room: 3V3
L9 = IND PWR SH 10uH 3.1A  8x8: room: 5V
L14 = COM_CHOKE_USB3_DLP11TB800UL2
Q1 = MOSFET N-Ch,20 V, 3.3 A,SOT-23
Q2 = TMP_091600
Q3 = N-MOSFET,NDS335N
R1 = RES_510_0402_1%
R2 = RES_0R_0603: room: AUDIO
R3 R18 R20 R22 R23 R25 R35 R88 = RES_100R_0402
R4-R6 R26 R82-R85 = RES_4.7K_0402
R7 = RES_1.24R_0805_1%
R8 = RES_10K_0402: room: POWER BL
R9 R10 = RES_1K_0402_1%: room: USB HUB
R13 R15 R19 R28 R29 R32-R34 R51 R65 R72 R93 = RES_10K_0402
R14 R16 R80 = RES_1K_0402_1%
R17 R21 R24 = RESISTOR 8PACK_27R
R27 = RES_120R_0402_1%
R30 R31 R41 R44 R86 R100 = RES_10K_0402: room: MISC
R36-R38 R64 = RES_1K_0402_1%: room: USB FRONT
R40 R43 = RES_45.3K_0402_1%
R42 R87 = RES_1K_0603
R45 = RES_15K_0402_1%
R46 R94 = RES_0R_1210
R47 = RES_100K_0402: room: 3V3
R48 = RES_6.34K_0402_1%: room: 3V3
R49 = RES_22.6K_0402_1%
R50 = RES_68K_0402_1%: room: 3V3
R52 R53 R55-R57 R62 = RES_100K_0402: room: USB HUB
R54 = RES_470K_0402: room: USB HUB
R58-R61 = RES_1K_0402_1%: room: USB RAIR
R66 = RES_100K_0402: room: 5V
R67 = RES_22R_0402_1%: room: USB HUB
R68 = RES_1M_0402: room: USB HUB
R69 = RES_6.34K_0402_1%: room: 5V
R70 = RES_12.1K_0402_1%: room: USB HUB
R71 R73 R75 R76 R91 R92 = RES_1K_0402_1%: room: LCD
R74 = RES_62K_0402_1%: room: 5V
R77 R79 R102 R103 = RES_49.9R_0402_1%
R81 R89 R90 R101 = RES_0R_0402
R97-R99 = RES_330R_0402
R151 = RES_10K_0402: room: JTAG
SW1 = SW_ON/OFF_RA_500SSP1S1M6QEA
SW2-SW4 = SW PUSHBUTTON RA: room: SW
U1 U20 U21 = ESD ARRAY 4-LINE 5V SOT23-6: room: AUDIO
U2 = DC-DC LED Driver tps61165
U3 U8 = POWER_DES_DUAL ACTIVE HIGH: room: USB FRONT
U4 = LDO 1.5V 300MA SOT-23-5
U5 = 1G125
U6 = LVDS_RCV_24b_TSSOP56
U7 = CAN BUS TRX 3.3V
U9 U23 = IC DUAL MAX3232 DRVR/RCVR 3.3V: room: UART
U10 = DMIC
U12 = HDMI ESD IF
U13 = DC-DC BUCK 3A 340Khz SOP 8: room: 3V3
U14 = POWER_DES_DUAL ACTIVE HIGH: room: USB RAIR
U15 = USB HUB 4 PORT USB2514 QFN36: room: USB HUB
U16 = DC-DC BUCK 3A 340Khz SOP 8: room: 5V
U18 = RTC_ISL12057IUZ
U19 = RS-485 TRX w/En
U24 = POWER MON 3.3V 250mS ISL88011
U25 U26 = LEVEL_SHIFT_4BIT_SN74AVC4T245_0
U27 = IC POWER MON 2.9V 140mS MCP1322
Y1 = CRYSTAL 24.00 MHZ SMD: room: USB HUB
Y2 = CRYSTAL 32.768KHz

## Footprints (pads in the part's own frame, mm; a bottom-side part is the same pattern mirrored in y, then rotated)
1-1734592-0
  rect 0.3x1.1 smd: 1(2.25,1.6) 2(1.75,1.6) 3(1.25,1.6) 4(0.75,1.6) 5(0.25,1.6) 6(-0.25,1.6) 7(-0.75,1.6) 8(-1.25,1.6) 9(-1.75,1.6) 10(-2.25,1.6)
  rect 2.3x3.1 smd: 11(-3.92,-0.1) 12(3.92,-0.1)
0402
  round 0.559 smd: 1(-0.508,0) 2(0.508,0)
500SSP1S1M6QEA
  round 2.413 hole 1.803: 1(0,0) 2(0,-4.699) 3(0,-9.398) SH1(9.525,-11.303) SH2(9.525,1.905)
1210
  rect 0.991x2.794 smd: 1(-1.499,0) 2(1.499,0)
47589-0001
  oval 1.1x1.25 hole 0.701x0.851: (-2.25,3) (2.25,3)
  rect 0.356x1.397 smd: 1(-1.3,2.15) 2(-0.65,2.15) 3(0,2.15) 4(0.65,2.15) 5(1.3,2.15)
  rect 2.311x1.905 hole 1.35x0.6: 6(-3.8,-0.525) 7(3.8,-0.525)
  rect 1.803x1.905 smd: 10(1.2,-0.525) 11(-1.2,-0.525)
62684-401100ALF_REV
  rect 0.305x1.194 smd: 1(9.751,1.651) 2(9.251,1.651) 3(8.75,1.651) 4(8.25,1.651) 5(7.75,1.651) 6(7.249,1.651) 7(6.749,1.651) 8(6.251,1.651) 9(5.751,1.651) 10(5.25,1.651) 11(4.75,1.651) 12(4.249,1.651) 13(3.749,1.651) 14(3.251,1.651) 15(2.751,1.651) 16(2.25,1.651) 17(1.75,1.651) 18(1.25,1.651) 19(0.749,1.651) 20(0.249,1.651) 21(-0.249,1.651) 22(-0.749,1.651) 23(-1.25,1.651) 24(-1.75,1.651) 25(-2.25,1.651) 26(-2.751,1.651) 27(-3.251,1.651) 28(-3.749,1.651) 29(-4.249,1.651) 30(-4.75,1.651) 31(-5.25,1.651) 32(-5.751,1.651) 33(-6.251,1.651) 34(-6.749,1.651) 35(-7.249,1.651) 36(-7.75,1.651) 37(-8.25,1.651) 38(-8.75,1.651) 39(-9.251,1.651) 40(-9.751,1.651)
  custom 2.398x2.398 smd: M1(11.849,-1.049) M2(-11.849,-1.049)
1727010
  rect 2.032x2.032 hole 1.397: 1(0,0)
  round 2.032 hole 1.397: 2(3.81,0)
10067847
  round 2.159 hole 1.499: (-12.1,-12.15) (12.1,-12.15)
  rect 0.991x1.499 smd: 1(6.875,12.15) 2(4.375,12.15) 3(1.075,12.15) 4(-0.625,12.15) 5(-3.125,12.15) 6(-5.625,12.15) 7(-8.05,12.15) 8(-9.75,12.15) 9(9.375,12.15) 10(2.725,12.15) 11(-13.1,12.15)
  rect 1.194x2.21 smd: 12(14.4,-8.85) 13(-13.6,-10.05)
20021121-00010C4LF
  rect 0.762x2.4 smd: 1(-2.54,-1.95) 2(-2.54,1.95) 3(-1.27,-1.95) 4(-1.27,1.95) 5(0,-1.95) 6(0,1.95) 7(1.27,-1.95) 8(1.27,1.95) 9(2.54,-1.95) 10(2.54,1.95)
20021121-00016C4LF
  round 0.254 hole 1.016 unplated: (-3.81,0) (3.81,0)
  rect 0.762x2.4 smd: 1(-4.445,-1.95) 2(-4.445,1.95) 3(-3.175,-1.95) 4(-3.175,1.95) 5(-1.905,-1.95) 6(-1.905,1.95) 7(-0.635,-1.95) 8(-0.635,1.95) 9(0.635,-1.95) 10(0.635,1.95) 11(1.905,-1.95) 12(1.905,1.95) 13(3.175,-1.95) 14(3.175,1.95) 15(4.445,-1.95) 16(4.445,1.95)
0483380085
  rect 2.311x3.2 smd: (-14.65,3.5) (14.65,3.5)
  round 0.254 hole 1.118 unplated: (-12.5,0)
  round 3.988 hole 2.6: (-12.1,-23.9) (-12.1,-48.05) (12.1,-23.9) (12.1,-48.05)
  round 0.254 hole 1.6 unplated: (12.5,0)
  rect 0.61x2.007 smd: 1(11.8,4.1) 2(11.4,-4.1) 3(11,4.1) 4(10.6,-4.1) 5(10.2,4.1) 6(9.8,-4.1) 7(9.4,4.1) 8(9,-4.1) 9(8.6,4.1) 10(8.2,-4.1) 11(7.8,4.1) 12(7.4,-4.1) 13(7,4.1) 14(6.6,-4.1) 15(6.2,4.1) 16(5.8,-4.1) 17(2.2,4.1) 18(1.8,-4.1) 19(1.4,4.1) 20(1,-4.1) 21(0.6,4.1) 22(0.2,-4.1) 23(-0.2,4.1) 24(-0.6,-4.1) 25(-1,4.1) 26(-1.4,-4.1) 27(-1.8,4.1) 28(-2.2,-4.1) 29(-2.6,4.1) 30(-3,-4.1) 31(-3.4,4.1) 32(-3.8,-4.1) 33(-4.2,4.1) 34(-4.6,-4.1) 35(-5,4.1) 36(-5.4,-4.1) 37(-5.8,4.1) 38(-6.2,-4.1) 39(-6.6,4.1) 40(-7,-4.1) 41(-7.4,4.1) 42(-7.8,-4.1) 43(-8.2,4.1) 44(-8.6,-4.1) 45(-9,4.1) 46(-9.4,-4.1) 47(-9.8,4.1) 48(-10.2,-4.1) 49(-10.6,4.1) 50(-11,-4.1) 51(-11.4,4.1) 52(-11.8,-4.1)
BHSR-02VS-1
  rect 1.9x0.85 smd: 1(-4.35,-3.325) 3(-4.35,3.325)
  rect 2.2x1 smd: 2(4.2,-3.25) 4(4.2,3.25)
C0402
  round 0.559 smd: 1(-0.508,0) 2(0.508,0)
C0603
  rect 0.635x0.889 smd: 1(-0.699,0) 2(0.699,0)
C0805
  rect 1.321x1.524 smd: 1(-0.953,0) 2(0.953,0)
C1210
  rect 1.016x2.794 smd: 1(-1.537,0) 2(1.511,0)
CON_SIM_CD_2P54MM
  rect 1.702x1.295 smd: 1(14.57,3.9) 2(14.57,1.36) 3(14.57,-1.18) 4(-11.15,3.9) 5(-11.15,1.36) 6(-11.15,-1.18)
  round 1.854 hole 1.118: 7(9.61,-6)
  round 2.642 hole 1.6: 8(-6.19,6)
CONR_3_DC3_S
  round 2.21 hole 1.6: (-3.05,0)
  round 2.413 hole 1.803: (1.45,0)
  rect 2.692x2.007 smd: 1(-3.05,-5.5) 2(3.05,-5.5) 3(3.05,5.5) 4(-3.05,5.5)
CONR_6_MOLEX_39_SMD
  rect 0.61x1.905 smd: 1(-1.5,1.4) 2(-0.5,1.4) 3(0.5,1.4) 4(1.5,1.4)
  rect 2.108x2.794 smd: 5(-4.65,-0.95) 6(4.65,-0.95)
CONR_11_RD_SERIES
  rect 1.702x1.702 hole 1.092: 1(0,0)
  round 1.702 hole 1.092: 2(2.77,0) 3(5.54,0) 4(8.31,0) 5(11.08,0) 6(1.385,-2.84) 7(4.155,-2.84) 8(6.925,-2.84) 9(9.695,-2.84)
  round 3.937 hole 3.175: 10(-6.98,-1.42) 11(18.01,-1.42)
CONR_42_MOLEX_197_SMD_S
  rect 1.702x1.6 smd: (-11.4,-4) (11.4,-4)
  rect 0.279x1.194 smd: 1(-9.75,0) 2(-9.25,0) 3(-8.75,0) 4(-8.25,0) 5(-7.75,0) 6(-7.25,0) 7(-6.75,0) 8(-6.25,0) 9(-5.75,0) 10(-5.25,0) 11(-4.75,0) 12(-4.25,0) 13(-3.75,0) 14(-3.25,0) 15(-2.75,0) 16(-2.25,0) 17(-1.75,0) 18(-1.25,0) 19(-0.75,0) 20(-0.25,0) 21(0.25,0) 22(0.75,0) 23(1.25,0) 24(1.75,0) 25(2.25,0) 26(2.75,0) 27(3.25,0) 28(3.75,0) 29(4.25,0) 30(4.75,0) 31(5.25,0) 32(5.75,0) 33(6.25,0) 34(6.75,0) 35(7.25,0) 36(7.75,0) 37(8.25,0) 38(8.75,0) 39(9.25,0) 40(9.75,0)
  custom 2.4x2.4 smd: 41(-12.45,-2.7) 42(12.45,-2.7)
D0603
  rect 0.635x0.889 smd: 1(-0.699,0) 2(0.699,0)
D_RCX501L
  rect 1.727x2.108 smd: 1(2.159,0) 2(-2.159,0)
DF14H-20P-1_25H
  round 0.508 hole 1.118 unplated: (-1.092,-14.478) (-1.092,14.478)
  rect 1.803x0.711 smd: 1(0,11.887) 2(0,10.617) 3(0,9.373) 4(0,8.128) 5(0,6.883) 6(0,5.613) 7(0,4.369) 8(0,3.124) 9(0,1.88) 10(0,0.635) 11(0,-0.635) 12(0,-1.88) 13(0,-3.124) 14(0,-4.369) 15(0,-5.613) 16(0,-6.883) 17(0,-8.128) 18(0,-9.373) 19(0,-10.617) 20(0,-11.887)
  rect 2.794x2.032 smd: 21(-5.105,14.275) 22(-5.105,-14.275)
DIMM200
  round 0.508 hole 1.118 unplated: (-33.4,0)
  rect 4.496x4.597 smd: (-32.55,-12) (32.55,-12)
  round 0.762 hole 1.6 unplated: (33.4,0)
  rect 0.356x1.981 smd: 1(31.65,4.1) 2(31.35,-4.1) 3(31.05,4.1) 4(30.75,-4.1) 5(30.45,4.1) 6(30.15,-4.1) 7(29.85,4.1) 8(29.55,-4.1) 9(29.25,4.1) 10(28.95,-4.1) 11(28.65,4.1) 12(28.35,-4.1) 13(28.05,4.1) 14(27.75,-4.1) 15(27.45,4.1) 16(27.15,-4.1) 17(26.85,4.1) 18(26.55,-4.1) 19(26.25,4.1) 20(25.95,-4.1) 21(25.65,4.1) 22(25.35,-4.1) 23(25.05,4.1) 24(24.75,-4.1) 25(24.45,4.1) 26(24.15,-4.1) 27(23.85,4.1) 28(23.55,-4.1) 29(23.25,4.1) 30(22.95,-4.1) 31(22.65,4.1) 32(22.35,-4.1) 33(22.05,4.1) 34(21.75,-4.1) 35(21.45,4.1) 36(21.15,-4.1) 37(20.85,4.1) 38(20.55,-4.1) 39(20.25,4.1) 40(19.95,-4.1) 41(16.05,4.1) 42(15.75,-4.1) 43(15.45,4.1) 44(15.15,-4.1) 45(14.85,4.1) 46(14.55,-4.1) 47(14.25,4.1) 48(13.95,-4.1) 49(13.65,4.1) 50(13.35,-4.1) 51(13.05,4.1) 52(12.75,-4.1) 53(12.45,4.1) 54(12.15,-4.1) 55(11.85,4.1) 56(11.55,-4.1) 57(11.25,4.1) 58(10.95,-4.1) 59(10.65,4.1) 60(10.35,-4.1) 61(10.05,4.1) 62(9.75,-4.1) 63(9.45,4.1) 64(9.15,-4.1) 65(8.85,4.1) 66(8.55,-4.1) 67(8.25,4.1) 68(7.95,-4.1) 69(7.65,4.1) 70(7.35,-4.1) 71(7.05,4.1) 72(6.75,-4.1) 73(6.45,4.1) 74(6.15,-4.1) 75(5.85,4.1) 76(5.55,-4.1) 77(5.25,4.1) 78(4.95,-4.1) 79(4.65,4.1) 80(4.35,-4.1) 81(4.05,4.1) 82(3.75,-4.1) 83(3.45,4.1) 84(3.15,-4.1) 85(2.85,4.1) 86(2.55,-4.1) 87(2.25,4.1) 88(1.95,-4.1) 89(1.65,4.1) 90(1.35,-4.1) 91(1.05,4.1) 92(0.75,-4.1) 93(0.45,4.1) 94(0.15,-4.1) 95(-0.15,4.1) 96(-0.45,-4.1) 97(-0.75,4.1) 98(-1.05,-4.1) 99(-1.35,4.1) 100(-1.65,-4.1) 101(-1.95,4.1) 102(-2.25,-4.1) 103(-2.55,4.1) 104(-2.85,-4.1) 105(-3.15,4.1) 106(-3.45,-4.1) 107(-3.75,4.1) 108(-4.05,-4.1) 109(-4.35,4.1) 110(-4.65,-4.1) 111(-4.95,4.1) 112(-5.25,-4.1) 113(-5.55,4.1) 114(-5.85,-4.1) 115(-6.15,4.1) 116(-6.45,-4.1) 117(-6.75,4.1) 118(-7.05,-4.1) 119(-7.35,4.1) 120(-7.65,-4.1) 121(-7.95,4.1) 122(-8.25,-4.1) 123(-8.55,4.1) 124(-8.85,-4.1) 125(-9.15,4.1) 126(-9.45,-4.1) 127(-9.75,4.1) 128(-10.05,-4.1) 129(-10.35,4.1) 130(-10.65,-4.1) 131(-10.95,4.1) 132(-11.25,-4.1) 133(-11.55,4.1) 134(-11.85,-4.1) 135(-12.15,4.1) 136(-12.45,-4.1) 137(-12.75,4.1) 138(-13.05,-4.1) 139(-13.35,4.1) 140(-13.65,-4.1) 141(-13.95,4.1) 142(-14.25,-4.1) 143(-14.55,4.1) 144(-14.85,-4.1) 145(-15.15,4.1) 146(-15.45,-4.1) 147(-15.75,4.1) 148(-16.05,-4.1) 149(-16.35,4.1) 150(-16.65,-4.1) 151(-16.95,4.1) 152(-17.25,-4.1) 153(-17.55,4.1) 154(-17.85,-4.1) 155(-18.15,4.1) 156(-18.45,-4.1) 157(-18.75,4.1) 158(-19.05,-4.1) 159(-19.35,4.1) 160(-19.65,-4.1) 161(-19.95,4.1) 162(-20.25,-4.1) 163(-20.55,4.1) 164(-20.85,-4.1) 165(-21.15,4.1) 166(-21.45,-4.1) 167(-21.75,4.1) 168(-22.05,-4.1) 169(-22.35,4.1) 170(-22.65,-4.1) 171(-22.95,4.1) 172(-23.25,-4.1) 173(-23.55,4.1) 174(-23.85,-4.1) 175(-24.15,4.1) 176(-24.45,-4.1) 177(-24.75,4.1) 178(-25.05,-4.1) 179(-25.35,4.1) 180(-25.65,-4.1) 181(-25.95,4.1) 182(-26.25,-4.1) 183(-26.55,4.1) 184(-26.85,-4.1) 185(-27.15,4.1) 186(-27.45,-4.1) 187(-27.75,4.1) 188(-28.05,-4.1) 189(-28.35,4.1) 190(-28.65,-4.1) 191(-28.95,4.1) 192(-29.25,-4.1) 193(-29.55,4.1) 194(-29.85,-4.1) 195(-30.15,4.1) 196(-30.45,-4.1) 197(-30.75,4.1) 198(-31.05,-4.1) 199(-31.35,4.1) 200(-31.65,-4.1)
DLP11TB800UL2
  rect 0.254x0.508 smd: 1(-0.5,-0.402) 2(0.5,-0.402) 3(0.5,0.402) 4(-0.5,0.402)
DUAL_USB_72309
  round 3.073 hole 2.311: 1(-3.07,0.35) 2(-3.07,-5.33) 3(10.07,-5.33) 4(10.07,0.35)
  round 1.524 hole 0.914: A1(0,0) A2(2.5,0) A3(4.5,0) A4(7,0) B1(0,-2.62) B2(2.5,-2.62) B3(4.5,-2.62) B4(7,-2.62)
EEE1EA331UP
  rect 3.988x2.007 smd: 1(-3.55,0) 2(3.55,0)
FB0603
  rect 0.635x0.889 smd: 1(-0.699,0) 2(0.699,0)
FIDUCIAL
  round 1.524 smd: 1(0,0)
HDMI-SMT-W-FLANGE
  rect 0.305x1.905 smd: 1(4.75,3.45) 2(4.25,3.45) 3(3.75,3.45) 4(3.25,3.45) 5(2.75,3.45) 6(2.25,3.45) 7(1.75,3.45) 8(1.25,3.45) 9(0.75,3.45) 10(0.25,3.45) 11(-0.25,3.45) 12(-0.75,3.45) 13(-1.25,3.45) 14(-1.75,3.45) 15(-2.25,3.45) 16(-2.75,3.45) 17(-3.25,3.45) 18(-3.75,3.45) 19(-4.25,3.45)
  round 2.032 hole 1.295: MTG1(7.25,2.45) MTG2(-7.25,2.45) MTG3(-7.85,-2.45) MTG4(7.85,-2.45)
HDR_20M_100_TH
  rect 1.778x1.778 hole 1.143: 1(0,0)
  round 1.778 hole 1.143: 2(2.54,0) 3(0,-2.54) 4(2.54,-2.54) 5(0,-5.08) 6(2.54,-5.08) 7(0,-7.62) 8(2.54,-7.62) 9(0,-10.16) 10(2.54,-10.16) 11(0,-12.7) 12(2.54,-12.7) 13(0,-15.24) 14(2.54,-15.24) 15(0,-17.78) 16(2.54,-17.78) 17(0,-20.32) 18(2.54,-20.32) 19(0,-22.86) 20(2.54,-22.86)
HOLE3_6
  round 5.994 hole 2.997: 1(0,0)
HOLE_85_180
  round 4.572 hole 2.159: 1(0,0)
HSMG-C680
  rect 0.889x0.889 smd: (0,0.65)
  rect 1.499x1.499 smd: 1(-1.75,0) 2(1.75,0)
JUMP2X5-6040
  rect 1.524x1.524 hole 1.016: 1(0,0)
  round 1.524 hole 1.016: 2(0,2.54) 3(2.54,0) 4(2.54,2.54) 5(5.08,0) 6(5.08,2.54) 7(7.62,0) 8(7.62,2.54) 9(10.16,0) 10(10.16,2.54)
KEYSTONE-3000
  rect 3.175x3.175 smd: 1(-7.874,0) 2(7.874,0)
  rect 3.988x3.988 smd: 3(0,0)
KT11B2SAM34LFS
  rect 4.191x1.46 smd: 1(0,3.651) 3(0,-3.651)
  rect 3.759x1.206 smd: 2(0.546,1.873) 4(0.546,-1.873)
L829-1J1T-43
  round 4.013 hole 3.251: (0.254,6.604) (9.906,6.604)
  rect 1.499x1.499 hole 0.889: 1(0,0)
  round 1.499 hole 0.889: 2(2.032,0) 3(4.064,0) 4(6.096,0) 5(8.128,0) 6(10.16,0) 7(-1.016,-2.54) 8(1.016,-2.54) 9(3.048,-2.54) 10(7.112,-2.54) 11(9.144,-2.54) 12(11.176,-2.54)
  round 1.905 hole 1.27: 13(-2.438,12.954) 14(-2.438,15.494) 15(12.598,10.414) 16(12.598,12.954) 17(12.598,15.494)
  round 2.184 hole 1.575: SH1(-3.708,6.604) SH2(13.868,6.604)
L_CPFC85
  rect 1.778x2.489 smd: 1(-4.14,-2.642) 2(-4.14,2.642) 3(4.14,2.642) 4(4.14,-2.642)
LED_SMT_0603_RA
  rect 0.711x0.711 smd: 1(-0.711,0) 2(0.711,0)
LQH3NPN100NJ0L
  rect 1.499x3.302 smd: 1(-1.15,0) 2(1.15,0)
MSOP8
  rect 0.356x0.991 smd: 1(-0.975,-2.225) 2(-0.325,-2.225) 3(0.325,-2.225) 4(0.975,-2.225) 5(0.975,2.225) 6(0.325,2.225) 7(-0.325,2.225) 8(-0.975,2.225)
MSOP10
  rect 0.279x1.143 smd: 1(-1,-2.232) 2(-0.5,-2.232) 3(0,-2.232) 4(0.5,-2.232) 5(1,-2.232) 6(1,2.232) 7(0.5,2.232) 8(0,2.232) 9(-0.5,2.232) 10(-1,2.232)
NR
  rect 1.905x8.306 smd: 1(-3.35,0) 2(3.35,0)
NX5032GB
  rect 2.007x2.413 smd: 1(-2.003,0) 2(2.003,0)
PCIE_36_EMS2
  rect 0.7x4.2 smd: A1(0.65,3.5) A2(1.65,3.5) A3(2.65,3.5) A4(3.65,3.5) A5(4.65,3.5) A6(5.65,3.5) A7(6.65,3.5) A8(7.65,3.5) A9(8.65,3.5) A10(9.65,3.5) A11(10.65,3.5) A12(13.65,3.5) A13(14.65,3.5) A14(15.65,3.5) A15(16.65,3.5) A16(17.65,3.5) A17(18.65,3.5) A18(19.65,3.5) B1(0.65,3.5) B2(1.65,3.5) B3(2.65,3.5) B4(3.65,3.5) B5(4.65,3.5) B6(5.65,3.5) B7(6.65,3.5) B8(7.65,3.5) B9(8.65,3.5) B10(9.65,3.5) B11(10.65,3.5) B12(13.65,3.5) B13(14.65,3.5) B14(15.65,3.5) B15(16.65,3.5) B16(17.65,3.5) B17(18.65,3.5) B18(19.65,3.5)
PG-TSDSON-8
  rect 0.33x0.787 smd: 1(-0.953,-1.511) 2(-0.318,-1.511) 3(0.318,-1.511) 4(0.953,-1.511)
  rect 0.33x0.66 smd: 5(0.953,1.575) 6(0.318,1.575) 7(-0.318,1.575) 8(-0.953,1.575)
PVQFN_16N
  rect 0.813x0.229 smd: 1(-1.975,-0.794) 8(1.975,-0.794) 9(1.975,0.794) 16(-1.975,0.794)
  rect 0.229x0.813 smd: 2(-1.25,-1.725) 3(-0.75,-1.725) 4(-0.25,-1.725) 5(0.25,-1.725) 6(0.75,-1.725) 7(1.25,-1.725) 10(1.25,1.725) 11(0.75,1.725) 12(0.25,1.725) 13(-0.25,1.725) 14(-0.75,1.725) 15(-1.25,1.725)
  rect 2.54x2.032 smd: 17(0,0)
QFN-6
  rect 0.279x0.711 smd: 1(-0.65,-1.05) 2(0,-1.05) 3(0.65,-1.05) 4(0.65,1.05) 5(0,1.05) 6(-0.65,1.05)
  rect 1.6x0.991 smd: 7(0,0)
QFP_6X6_36
  oval 0.787x0.279 smd: 1(-2.975,2) 2(-2.975,1.5) 3(-2.975,1) 4(-2.975,0.5) 5(-2.975,0) 6(-2.975,-0.5) 7(-2.975,-1) 8(-2.975,-1.5) 9(-2.975,-2) 19(2.975,-2) 20(2.975,-1.5) 21(2.975,-1) 22(2.975,-0.5) 23(2.975,0) 24(2.975,0.5) 25(2.975,1) 26(2.975,1.5) 27(2.975,2)
  oval 0.279x0.787 smd: 10(-2,-2.975) 11(-1.5,-2.975) 12(-1,-2.975) 13(-0.5,-2.975) 14(0,-2.975) 15(0.5,-2.975) 16(1,-2.975) 17(1.5,-2.975) 18(2,-2.975) 28(2,2.975) 29(1.5,2.975) 30(1,2.975) 31(0.5,2.975) 32(0,2.975) 33(-0.5,2.975) 34(-1,2.975) 35(-1.5,2.975) 36(-2,2.975)
  rect 3.81x3.81 smd: 37(0,0)
R0402
  round 0.559 smd: 1(-0.508,0) 2(0.508,0)
R0603
  rect 0.635x0.889 smd: 1(-0.699,0) 2(0.699,0)
R0805
  rect 1.321x1.524 smd: 1(-0.953,0) 2(0.953,0)
R1210
  rect 1.016x2.794 smd: 1(-1.537,0) 2(1.511,0)
RC0805
  rect 1.295x1.499 smd: 1(-0.965,0) 2(0.965,0)
RNEXB2HV
  rect 0.432x0.508 smd: 1(-1.843,-0.754) 8(1.863,-0.754) 9(1.863,0.754) 16(-1.843,0.754)
  rect 0.254x0.508 smd: 2(-1.25,-0.754) 3(-0.746,-0.754) 4(-0.242,-0.754) 5(0.262,-0.754) 6(0.766,-0.754) 7(1.27,-0.754) 10(1.27,0.754) 11(0.766,0.754) 12(0.262,0.754) 13(-0.242,0.754) 14(-0.746,0.754) 15(-1.25,0.754)
SATA_F
  round 1.016 hole 1.194 unplated: (-2.138,20) (-2.138,-20) (-0.338,-18.4)
  round 0.889 hole 0.94 unplated: (-0.338,18.4)
  rect 1.905x0.66 smd: P1(0,1.905) P2(0,0.635) P3(0,-0.635) P4(0,-1.905) P5(0,-3.175) P6(0,-4.445) P7(0,-5.715) P8(0,-6.985) P9(0,-8.255) P10(0,-9.525) P11(0,-10.795) P12(0,-12.065) P13(0,-13.335) P14(0,-14.605) P15(0,-15.875) S1(0,15.875) S2(0,14.605) S3(0,13.335) S4(0,12.065) S5(0,10.795) S6(0,9.525) S7(0,8.255)
SC70-5_A
  rect 1.27x0.406 smd: 1(-0.95,0.65) 2(-0.95,0) 3(-0.95,-0.65) 4(0.95,-0.65) 5(0.95,0.65)
SJ-3523-SMT
  round 0.254 hole 1.702 unplated: (-3.5,0) (3.5,0)
  rect 2.21x2.794 smd: 1(4.6,3.7) 3(2.6,-3.7)
  rect 2.794x2.794 smd: 2(-4.8,3.7)
SOD123
  rect 0.914x1.219 smd: 1(-1.638,0) 2(1.638,0)
SOIC8
  rect 1.499x0.61 smd: 1(-2.756,1.905) 2(-2.756,0.635) 3(-2.756,-0.635) 4(-2.756,-1.905) 5(2.756,-1.905) 6(2.756,-0.635) 7(2.756,0.635) 8(2.756,1.905)
SOIC16_150
  rect 0.61x2.007 smd: 1(-4.445,-2.4) 2(-3.175,-2.4) 3(-1.905,-2.4) 4(-0.635,-2.4) 5(0.635,-2.4) 6(1.905,-2.4) 7(3.175,-2.4) 8(4.445,-2.4) 9(4.445,2.4) 10(3.175,2.4) 11(1.905,2.4) 12(0.635,2.4) 13(-0.635,2.4) 14(-1.905,2.4) 15(-3.175,2.4) 16(-4.445,2.4)
SOP-8-RT8293A
  rect 0.61x1.575 smd: 1(-1.905,-2.515) 2(-0.635,-2.515) 3(0.635,-2.515) 4(1.905,-2.515) 5(1.905,2.515) 6(0.635,2.515) 7(-0.635,2.515) 8(-1.905,2.515)
  rect 3.505x2.489 smd: 9(0,0)
SOT23
  rect 0.787x0.889 smd: 1(-0.95,-1) 2(0.95,-1) 3(0,1)
SOT23-5
  oval 0.686x0.991 smd: 1(-0.953,-1.295) 2(0,-1.295) 3(0.953,-1.295) 4(0.953,1.295) 5(-0.953,1.295)
SOT23-5_ISL88011
  rect 0.61x1.194 smd: 1(-0.95,-1.2) 2(0,-1.2) 3(0.95,-1.2) 4(0.95,1.2) 5(-0.95,1.2)
SOT-23
  rect 0.787x0.889 smd: 1(-0.95,-1) 2(0.95,-1) 3(0,1)
SOT-666IP
  rect 0.279x0.991 smd: 1(-0.5,-0.805) 3(0.5,-0.805) 4(0.5,0.805) 5(0,0.805) 6(-0.5,0.805)
  rect 0.279x1.397 smd: 2(0,-0.602)
SPM0423HE4H-WB
  round 0.914 smd: 1(-1.168,1.651) 2(-1.168,0) 3(-1.168,-1.651) 4(1.168,-1.651) 5(1.168,0) 6(1.168,1.651)
SSMINI2
  rect 0.686x0.61 smd: 1(-0.787,0) 2(0.787,0)
TSSOP56
  rect 1.397x0.279 smd: 1(-3.835,6.748) 2(-3.835,6.248) 3(-3.835,5.749) 4(-3.835,5.249) 5(-3.835,4.749) 6(-3.835,4.249) 7(-3.835,3.749) 8(-3.835,3.249) 9(-3.835,2.749) 10(-3.835,2.249) 11(-3.835,1.75) 12(-3.835,1.25) 13(-3.835,0.75) 14(-3.835,0.25) 15(-3.835,-0.25) 16(-3.835,-0.75) 17(-3.835,-1.25) 18(-3.835,-1.75) 19(-3.835,-2.249) 20(-3.835,-2.749) 21(-3.835,-3.249) 22(-3.835,-3.749) 23(-3.835,-4.249) 24(-3.835,-4.749) 25(-3.835,-5.249) 26(-3.835,-5.749) 27(-3.835,-6.248) 28(-3.835,-6.748) 29(3.835,-6.748) 30(3.835,-6.248) 31(3.835,-5.749) 32(3.835,-5.249) 33(3.835,-4.749) 34(3.835,-4.249) 35(3.835,-3.749) 36(3.835,-3.249) 37(3.835,-2.749) 38(3.835,-2.249) 39(3.835,-1.75) 40(3.835,-1.25) 41(3.835,-0.75) 42(3.835,-0.25) 43(3.835,0.25) 44(3.835,0.75) 45(3.835,1.25) 46(3.835,1.75) 47(3.835,2.249) 48(3.835,2.749) 49(3.835,3.249) 50(3.835,3.749) 51(3.835,4.249) 52(3.835,4.749) 53(3.835,5.249) 54(3.835,5.749) 55(3.835,6.248) 56(3.835,6.748)
TSSOP_38_TPD12S521
  rect 1.092x0.279 smd: 1(-3,4.5) 2(-3,4) 3(-3,3.5) 4(-3,3) 5(-3,2.5) 6(-3,2) 7(-3,1.5) 8(-3,1) 9(-3,0.5) 10(-3,0) 11(-3,-0.5) 12(-3,-1) 13(-3,-1.5) 14(-3,-2) 15(-3,-2.5) 16(-3,-3) 17(-3,-3.5) 18(-3,-4) 19(-3,-4.5) 20(3,-4.5) 21(3,-4) 22(3,-3.5) 23(3,-3) 24(3,-2.5) 25(3,-2) 26(3,-1.5) 27(3,-1) 28(3,-0.5) 29(3,0) 30(3,0.5) 31(3,1) 32(3,1.5) 33(3,2) 34(3,2.5) 35(3,3) 36(3,3.5) 37(3,4) 38(3,4.5)
unnamed
  round 0.254 hole 0.8 unplated: (0,-0.363) (1.245,-0.363) (2.489,-0.363)
unnamed#3
  round 1.524 smd: 1(0,0)
unnamed#4
  round 0.762 hole 2.997 unplated: (0,0)
USB_TYPEA_TH_RA
  rect 1.6x1.6 hole 0.991: 1(0,0)
  round 1.676 hole 0.965: 2(2.499,0) 3(4.501,0) 4(7,0)
  round 3.048 hole 2.286: 5(-3.071,-2.71) 6(10.071,-2.71)
Y_FC135
  rect 0.991x1.803 smd: 1(-1.25,0) 2(1.25,0)

## Nets
3V3_SOM: J25.32(VCC_3V3_IN#32) J25.34(VCC_3V3_IN#34) J25.36(VCC_3V3_IN#36) J25.38(VCC_3V3_IN#38) J25.103(VCC_3V3_IN#103) J25.105(VCC_3V3_IN#105) J25.107(VCC_3V3_IN#107) J25.109(VCC_3V3_IN#109) J25.111(VCC_3V3_IN#111) R93.1 R94.1
DGND: C3.2 C8.2 C9.2 C10.2 C11.2 C12.2 C13.2 C14.2 C15.2 C16.2 C17.2 C18.2 C19.2 C20.2 C21.2 C22.2 C23.1 C24.2 C25.2 C26.2 C27.1 C28.2 C29.2 C30.2 C32.1 C35.1 C37.1 C41.2 C42.2 C43.2 C44.2 C46.2 C47.2 C48.2 C49.2 C50.2 C53.2 C55.2 C56.2 C57.2 C58.2 C59.2 C60.2 C61.1 C62.2 C63.1 C64.2 C65.1 C66.2 C67.2 C68.2 C69.2 C70.2 C71.2 C72.2 C73.2 C74.2 C76.2 C77.2 C78.2 C79.2 C80.2 C82.2 C83.2 C86.2 C87.1 C88.2 C90.2 C92.1 C93.2 C96.2 C98.2 C99.2 C100.2 C103.2 C104.2 C105.2 C106.2 C107.2 C108.2 C109.2 C110.2 C111.2 C112.1 C113.1 C115.1 C118.2 C120.1 C121.2 C122.2 C123.2 C124.2 C126.2 C127.2 C128.2 C129.2 C130.2 CX1.2 D1.2(K) D4.1 D5.1 D6.1 D8.1 D9.1 D10.1 D11.2 D12.1 D13.2 D14.1 D16.1 D17.1 D18.1 D19.1 D20.1 D21.1 D22.1 D23.1 D27.1 D28.1 D29.1 D30.1 D31.1 D32.1 HOLE1.1(EARTH) HOLE2.1(EARTH) HOLE3.1(EARTH) HOLE4.1(EARTH) HOLE5.1(EARTH) HOLE6.1(EARTH) J1.2(DAT2_S) J1.5(DAT1_S) J1.8(DAT0_S) J1.11(CLK_S) J1.17(DDC/CEC GND) J2.9 J2.10 J3.1 J3.2 J3.3 J3.4 J4.5 J4.6 J6.1(U/D) J6.10(VSS#10) J6.11(VSS#11) J6.12(VSS#12) J6.16(VSS#16) J6.20(VSS#20) J6.24(VSS#24) J6.28(VSS#28) J6.32(VSS#32) J6.36(VSS#36) J6.41(NC3) J6.42(NC4) J7.1 J7.10 J7.11 J7.12 J8.16 J9.4(GLED#4) J9.5(GLED#5) J9.12(VSS#12) J9.16(VSS#16) J9.20(VSS#20) J9.24(VSS#24) J9.28(VSS#28) J9.32(VSS#32) J9.36(VSS#36) J9.38(VSS#38) J9.40(U/D) J9.41(NC#41) J9.42(NC#42) J10.4(GND7) J10.9(GND1) J10.15(GND2) J10.18(GND8) J10.21(GND3) J10.26(GND9) J10.27(GND4) J10.29(GND5) J10.34(GND10) J10.35(GND6) J10.37(RESERVED3) J10.40(GND11) J10.43(RESERVED6) J10.50(GND12) J11.4(GND) J12.P4(GND_4) J12.P5(GND_5) J12.P6(GND_6) J12.P10(GND_7) J12.P11(DAS/DSS) J12.P12(GND_8) J12.S1(GND_1) J12.S4(GND_2) J12.S7(GND_3) J13.3(VSS1) J13.6(VSS2) J13.12(SHLD1) J13.13(SHLD2) J15.5 J15.10 J15.11 J16.5 J16.6 J17.A2(GND#A2) J17.A5(GND#A5) J17.A8(GND#A8) J17.A15(GND#A15) J17.A18(GND#A18) J17.B11(GND#B11) J17.B18(GND#B18) J22.3(GND#3) J22.4(GND#4) J22.7(GND#7) J22.10(GND#10) J22.13(GND#13) J22.16(GND#16) J22.21(SH1) J22.22(SH2) J24.10 J25.1(GND#1) J25.2(GND#2) J25.7(GND#7) J25.8(GND#8) J25.13(GND#13) J25.14(GND#14) J25.19(GND#19) J25.27(GND#27) J25.28(GND#28) J25.31(GND#31) J25.33(GND#33) J25.35(GND#35) J25.37(GND#37) J25.47(GND#47) J25.58(GND#58) J25.59(GND#59) J25.66(GND#66) J25.67(GND#67) J25.76(GND#76) J25.78(GND#78) J25.89(GND#89) J25.95(GND#95) J25.101(GND#101) J25.112(GND#112) J25.118(GND#118) J25.126(GND#126) J25.132(GND#132) J25.138(GND#138) J25.139(GND#139) J25.144(GND#144) J25.149(GND#149) J25.158(GND#158) J25.159(GND#159) J25.169(GND#169) J25.172(GND#172) J25.178(GND#178) J25.179(GND#179) J25.185(GND#185) J26.3 J26.4 J26.7 J26.8 J28.10 J29.10 J30.8 J30.36 J30.M1 J30.M2 J31.10 J32.10 J33.4 J33.6 J33.8 J33.10 J33.12 J33.14 J33.16 J33.18 J33.20 J34.5 J35.10 J36.10 J37.10 J38.5(GND) J38.6(S#6) J38.7(S#7) J38.10(S#10) J38.11(S#11) JBT1.3(-) L2.1 L4.1 L7.2 L10.2 Q1.2(SOURCE) Q3.2(S) R2.2 R3.1 R7.2 R8.2 R13.2 R26.2 R29.2 R32.2 R36.2 R44.2 R45.2 R49.2 R55.2 R56.2 R57.2 R62.2 R70.2 R71.1 R71.2 R72.2 R73.1 R76.1 R77.2 R79.2 R91.1 R101.2 SW1.SH1(SH#SH1) SW1.SH2(SH#SH2) SW2.1 SW2.3 SW2.4 SW3.1 SW3.3 SW3.4 SW4.1 SW4.3 SW4.4 U1.2(A2) U1.5(A5) U2.3(GND) U2.7(PAD) U3.4(ENB) U3.6(GND) U4.2(GND) U5.2(A) U5.3(GND) U6.4(GND#4) U6.8(LVDSGND#8) U6.14(LVDSGND#14) U6.21(LVDSGND#21) U6.22(PLLGND#22) U6.24(PLLGND#24) U6.28(GND#28) U6.36(GND#36) U6.44(GND#44) U6.52(GND#52) U7.2(GND) U8.6(GND) U9.15(GND) U10.1(GND#1) U10.2(L/R) U10.3(GND#3) U12.3(GND#3) U12.5(TMDS_GND#5) U12.8(TMDS_GND#8) U12.11(TMDS_GND#11) U12.14(TMDS_GND#14) U12.25(TMDS_GND#25) U12.28(TMDS_GND#28) U12.31(TMDS_GND#31) U12.34(TMDS_GND#34) U12.36(GND#36) U13.4(GND) U13.9(EP) U14.6(GND) U15.11(TEST) U15.37(VSS(FLAG)1) U16.4(GND) U16.9(EP) U18.4(GND) U19.2(RE#) U19.5(GND) U20.2(A2) U20.5(A5) U21.2(A2) U21.5(A5) U23.15(GND) U24.2(GND) U25.3(2DIR) U25.8(GND#8) U25.9(GND#9) U25.17(EP) U26.3(2DIR) U26.8(GND#8) U26.9(GND#9) U26.17(EP) U27.2(GND)
VCC_1V5_PCIE: C20.1 C105.1 C106.1 J10.6(1.5V_1) J10.28(1.5V_2) J10.48(1.5V_3) U4.5(VOUT)
VCC_3V3: C68.1 C69.1 L8.2 Q2.1(S#1) Q2.2(S#2) Q2.3(S#3) R50.2 R51.1 R63.1 R94.2
VCC_5V: C12.1 C23.2 C32.2 C48.1 C50.1 C63.2 C98.1 C99.1 J2.2 J9.1(VLED#1) J9.2(VLED#2) J12.P7(V5/PC) J12.P8(V5_2) J12.P9(V5_3) J25.104(USB_H1_VBUS) L5.2 L9.2 R1.1 R5.1 R6.1 R9.1 R74.2 U2.6(VIN) U3.7(IN) U8.7(IN) U12.1(5V_SUPPLY) U14.7(IN)
VCC_5V_HD1: C57.1 J1.18(+5V) U12.38(5V_OUT)
VCC_IN: C58.1 C59.1 C64.1 C77.1 C78.1 L2.2 R47.1 R66.1 U13.2(VIN) U16.2(VIN)
VCC_USB1: C8.1 C9.1 L3.1 U14.8(OUTA)
VCC_USB1_C: D8.2 J3.A1 L3.2
VCC_USB2: C44.1 C46.1 L6.2 U14.5(OUTB)
VCC_USB2_C: D6.2 J3.B1 L6.1
VCC_USB3: C121.1 L11.2 U8.8(OUTA)
VCC_USB3_C: D30.2 J16.1 L11.1
VCC_USB_3P3V: C71.1 C72.1 C76.1 C88.1 C93.1 C96.1 C100.1 FB2.1 R52.1 R53.1 R54.1 R64.2 U15.5(VDDA33#5) U15.10(VDDA33#10) U15.15(VDD33(REG)) U15.23(VDD33(IO)) U15.29(VDDA33#29) U15.36(VDDPLLREF/VDDA33)
A: J26.6 R88.1 U19.9(A)
ACBIAS: J6.9(DE) J9.9(DE) R21.11(2)
AUD_GND: J20.1(COM) J21.1(COM) J25.195(AGND#195) J25.196(AGND#196) R2.1
AUD_IN_L: C6.2 J25.197(LINEIN1_LP)
AUD_IN_L_C: C6.1 J21.3(R) U1.6(A6)
AUD_IN_R: C7.2 J25.199(LINEIN1_RP)
AUD_IN_R_C: C7.1 J21.2(L) U1.4(A4)
AUD_OUT_L: C5.1 J25.198(HPLOUT)
AUD_OUT_L_C: C5.2 J20.3(R) U1.1(A1)
AUD_OUT_R: C4.1 J25.200(HPROUT)
AUD_OUT_R_C: C4.2 J20.2(L) U1.3(A3)
AUDMUX4_RXC_PCIE_RESET_B: J10.22(PERST#) J25.22(AUDMUX4_RXC(GPIO5[13])) J37.2
AUDMUX4_RXD: J25.21((GPIO5[17])AUDMUX4_RXD) J37.9
AUDMUX4_RXFS_RX485_TX_EN: J25.23((GPIO5[12])AUDMUX4_RXFS) J37.4 U19.3(DE)
AUDMUX4_TXC: J25.25((GPIO5[14])AUDMUX4_TXC) J37.3
AUDMUX4_TXD: J25.26(AUDMUX4_TXD(GPIO5[15])) J37.5
AUDMUX4_TXFS: J25.24(AUDMUX4_TXFS(GPIO5[16])) J37.7
B: J26.5 R88.2 U19.8(B)
BASE_PER_3V3: C13.1 C14.1 C15.1 C17.1 C18.1 C19.1 C21.1 C22.1 C24.1 C25.1 C26.1 C27.2 C28.1 C29.1 C30.1 C35.2 C40.2 C41.1 C42.1 C43.1 C47.1 C83.1 C103.1 C104.1 C109.1 C110.1 C111.1 C116.1 C123.1 C124.1 C126.1 C127.1 C128.1 C130.1 D2.1(A) D15.1(ANODE1) D24.1 D25.1 D26.1 FB2.2 J2.1 J2.3 J6.4(VCC#4) J6.5(VCC#5) J6.6(VCC#6) J6.7(VCC#7) J7.2 J8.1 J9.6(VCC#6) J9.7(VCC#7) J10.2(3.3V_1) J10.24(+3.3VAUX) J10.39(RESERVED4) J10.41(RESERVED5) J10.52(3.3V_2) J12.P1(V33_1) J12.P2(V33_2) J12.P3(V33/PC) J13.4(VDD) J17.B10(3VCC) J17.B14(VIO) J22.1(3VCC#1) J22.2(3VCC#2) J24.1 J27.1 J28.1 J29.1 J31.1 J32.1 J33.2 J34.4 J35.1 J36.1 J37.1 Q2.5(D#5) Q2.6(D#6) Q2.7(D#7) Q2.8(D#8) R10.1 R14.1 R15.1 R16.1 R19.1 R28.1 R30.1 R31.1 R33.1 R34.1 R35.1 R37.1 R38.1 R40.1 R41.1 R43.1 R58.1 R59.1 R60.1 R61.1 R63.2 R73.2 R75.2 R80.1 R82.1 R83.1 R84.1 R85.1 R86.1 R92.2 R100.2 R102.2 R103.2 R151.2 U4.1(VIN) U4.3(EN) U4.4(NC) U5.5(VCC) U6.13(LVDSVCC) U6.23(PLLVCC) U6.31(VCC#31) U6.40(VCC#40) U6.48(VCC#48) U6.56(VCC#56) U7.3(VCC) U7.5(EN) U9.16(VCC) U10.6(VDD) U12.2(LV_SUPPLY) U19.10(VCC) U23.16(VCC) U24.5(VDD) U25.1(VCCA) U25.2(1DIR) U25.16(VCCB) U26.1(VCCA) U26.2(1DIR) U26.16(VCCB) U27.5(VDD)
BOOTSEL0/CPT_INT: CX1.1 D28.2 J2.4 J7.9 J25.42(BOOT_SEL0(GPIO3[7])) R16.2 SW3.2
BSEL1_SDMMC1_GPIO_CAM_CRTL: J17.B16(MIPI_CSI-2_A_PDWN) J25.40(BOOT_SEL1(GPIO3[13])) J32.8 R93.2
C_CE: J1.13(CEC) R4.2 U12.23(CE_REMOTE_OUT)
C_HDMI_HPD: C53.1 J1.19(DET) R45.1 U12.20(HOTPLUG_DET_OUT)
C_HDMI_SCL: J1.15(SCL) R5.2 U12.22(DDC_CLK_OUT)
C_HDMI_SDA: J1.16(SDA) R6.2 U12.21(DDC_DAT_OUT)
